# Altium PCB COIL-BOOST-10A.PcbDoc (part 1 of 5)
Units mm, origin at the board's own origin, x right, y up, seen from the top; angles counter-clockwise.
Board outline 80.1 x 100.1 mm, 4 copper layers (L1, L2, L3, L4), stack 1.512 mm thick; 282 components, 151 nets, 786 pads, 740 vias.
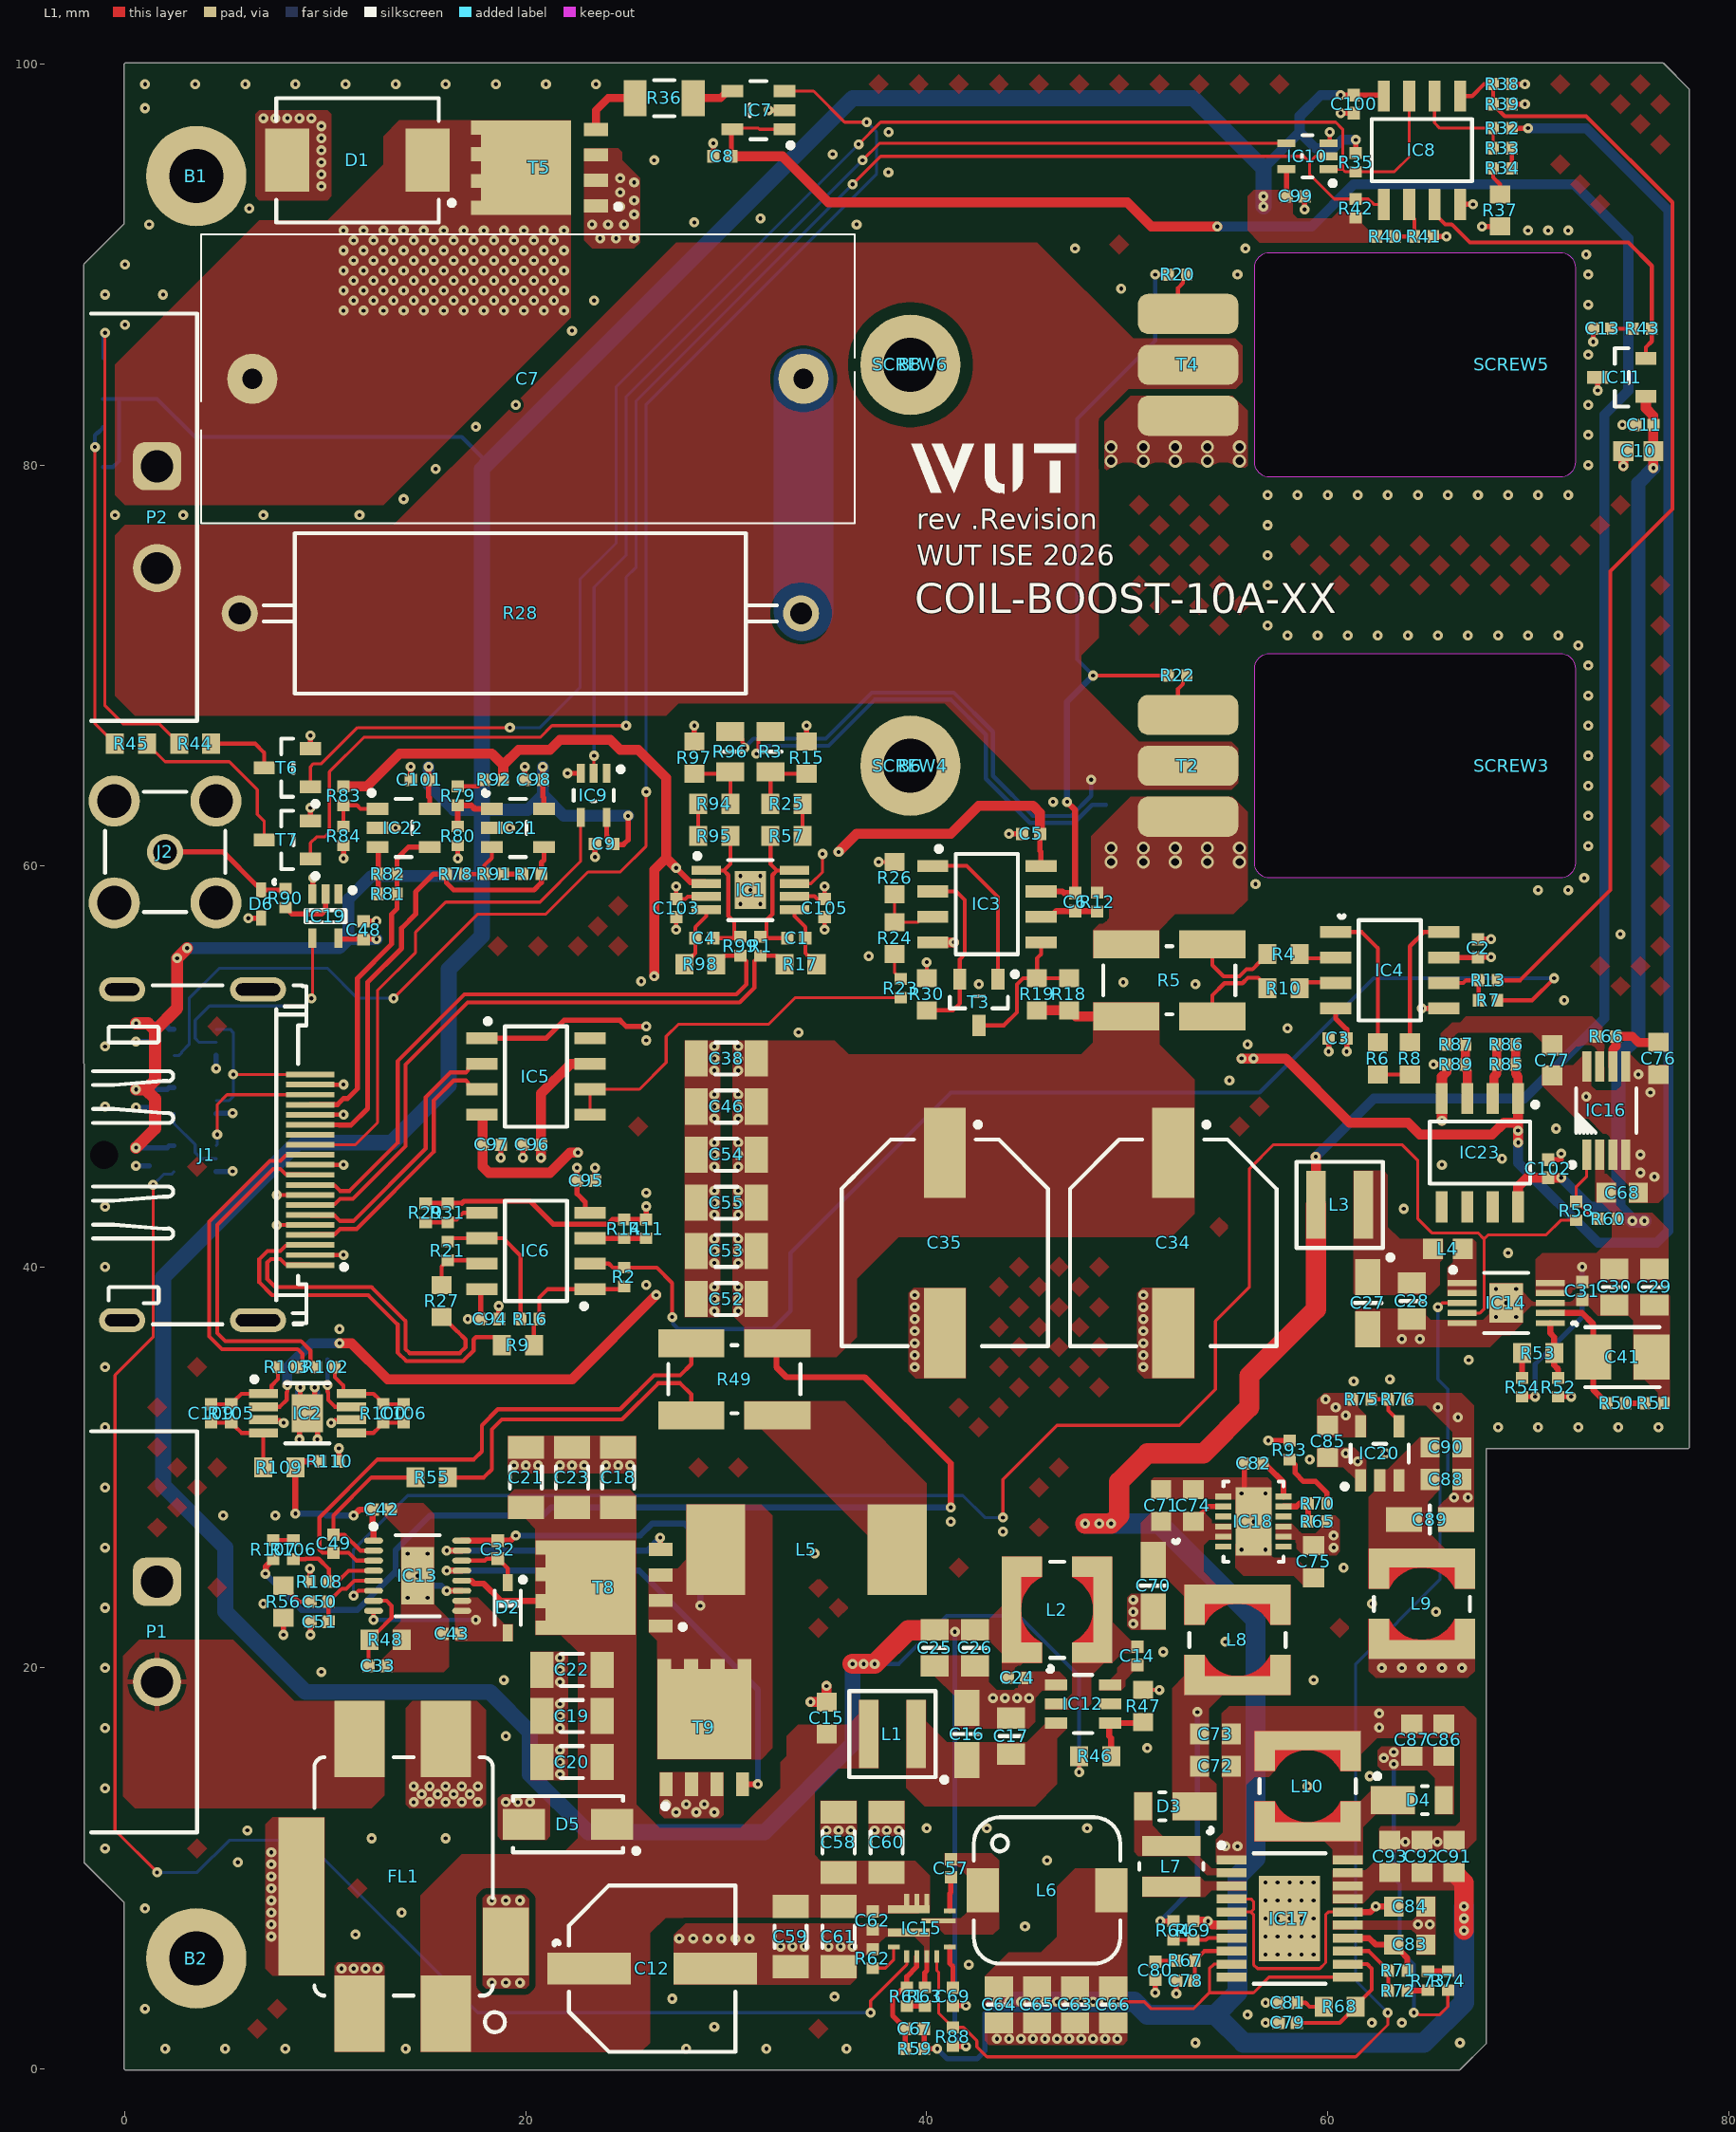
[diagram p0: L1 view]
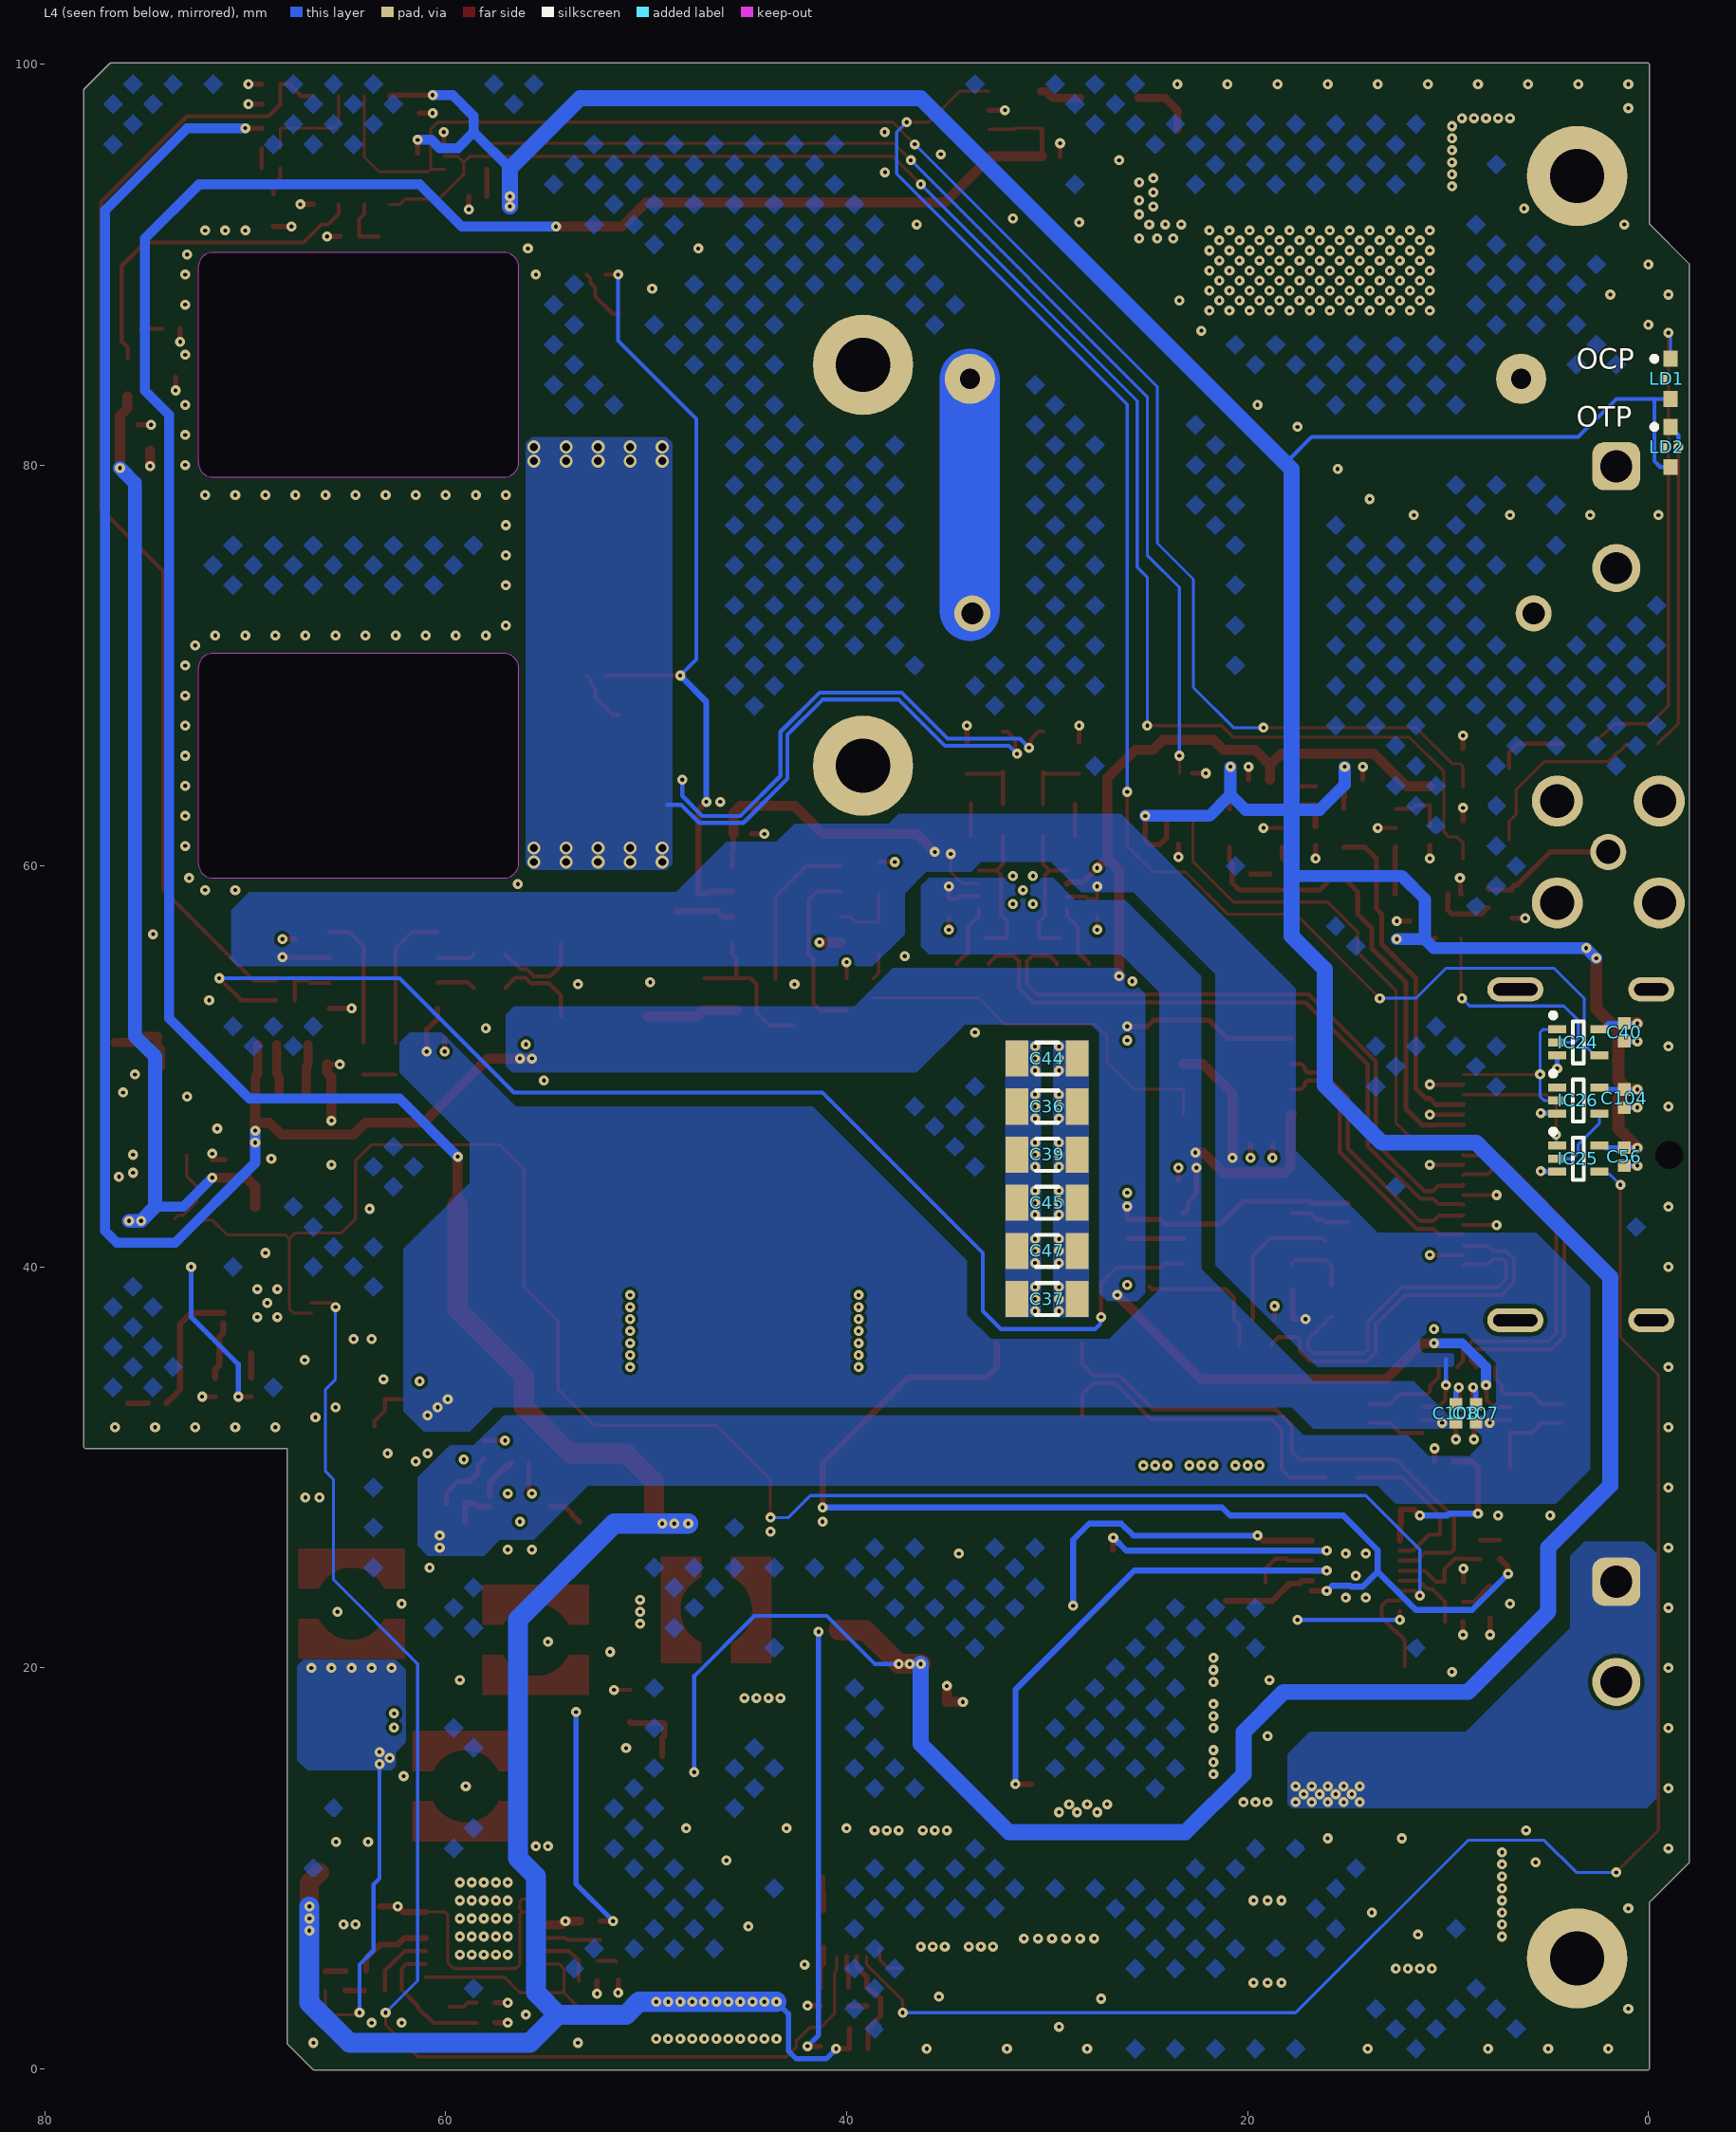
[diagram p1: L4 view, seen from below]
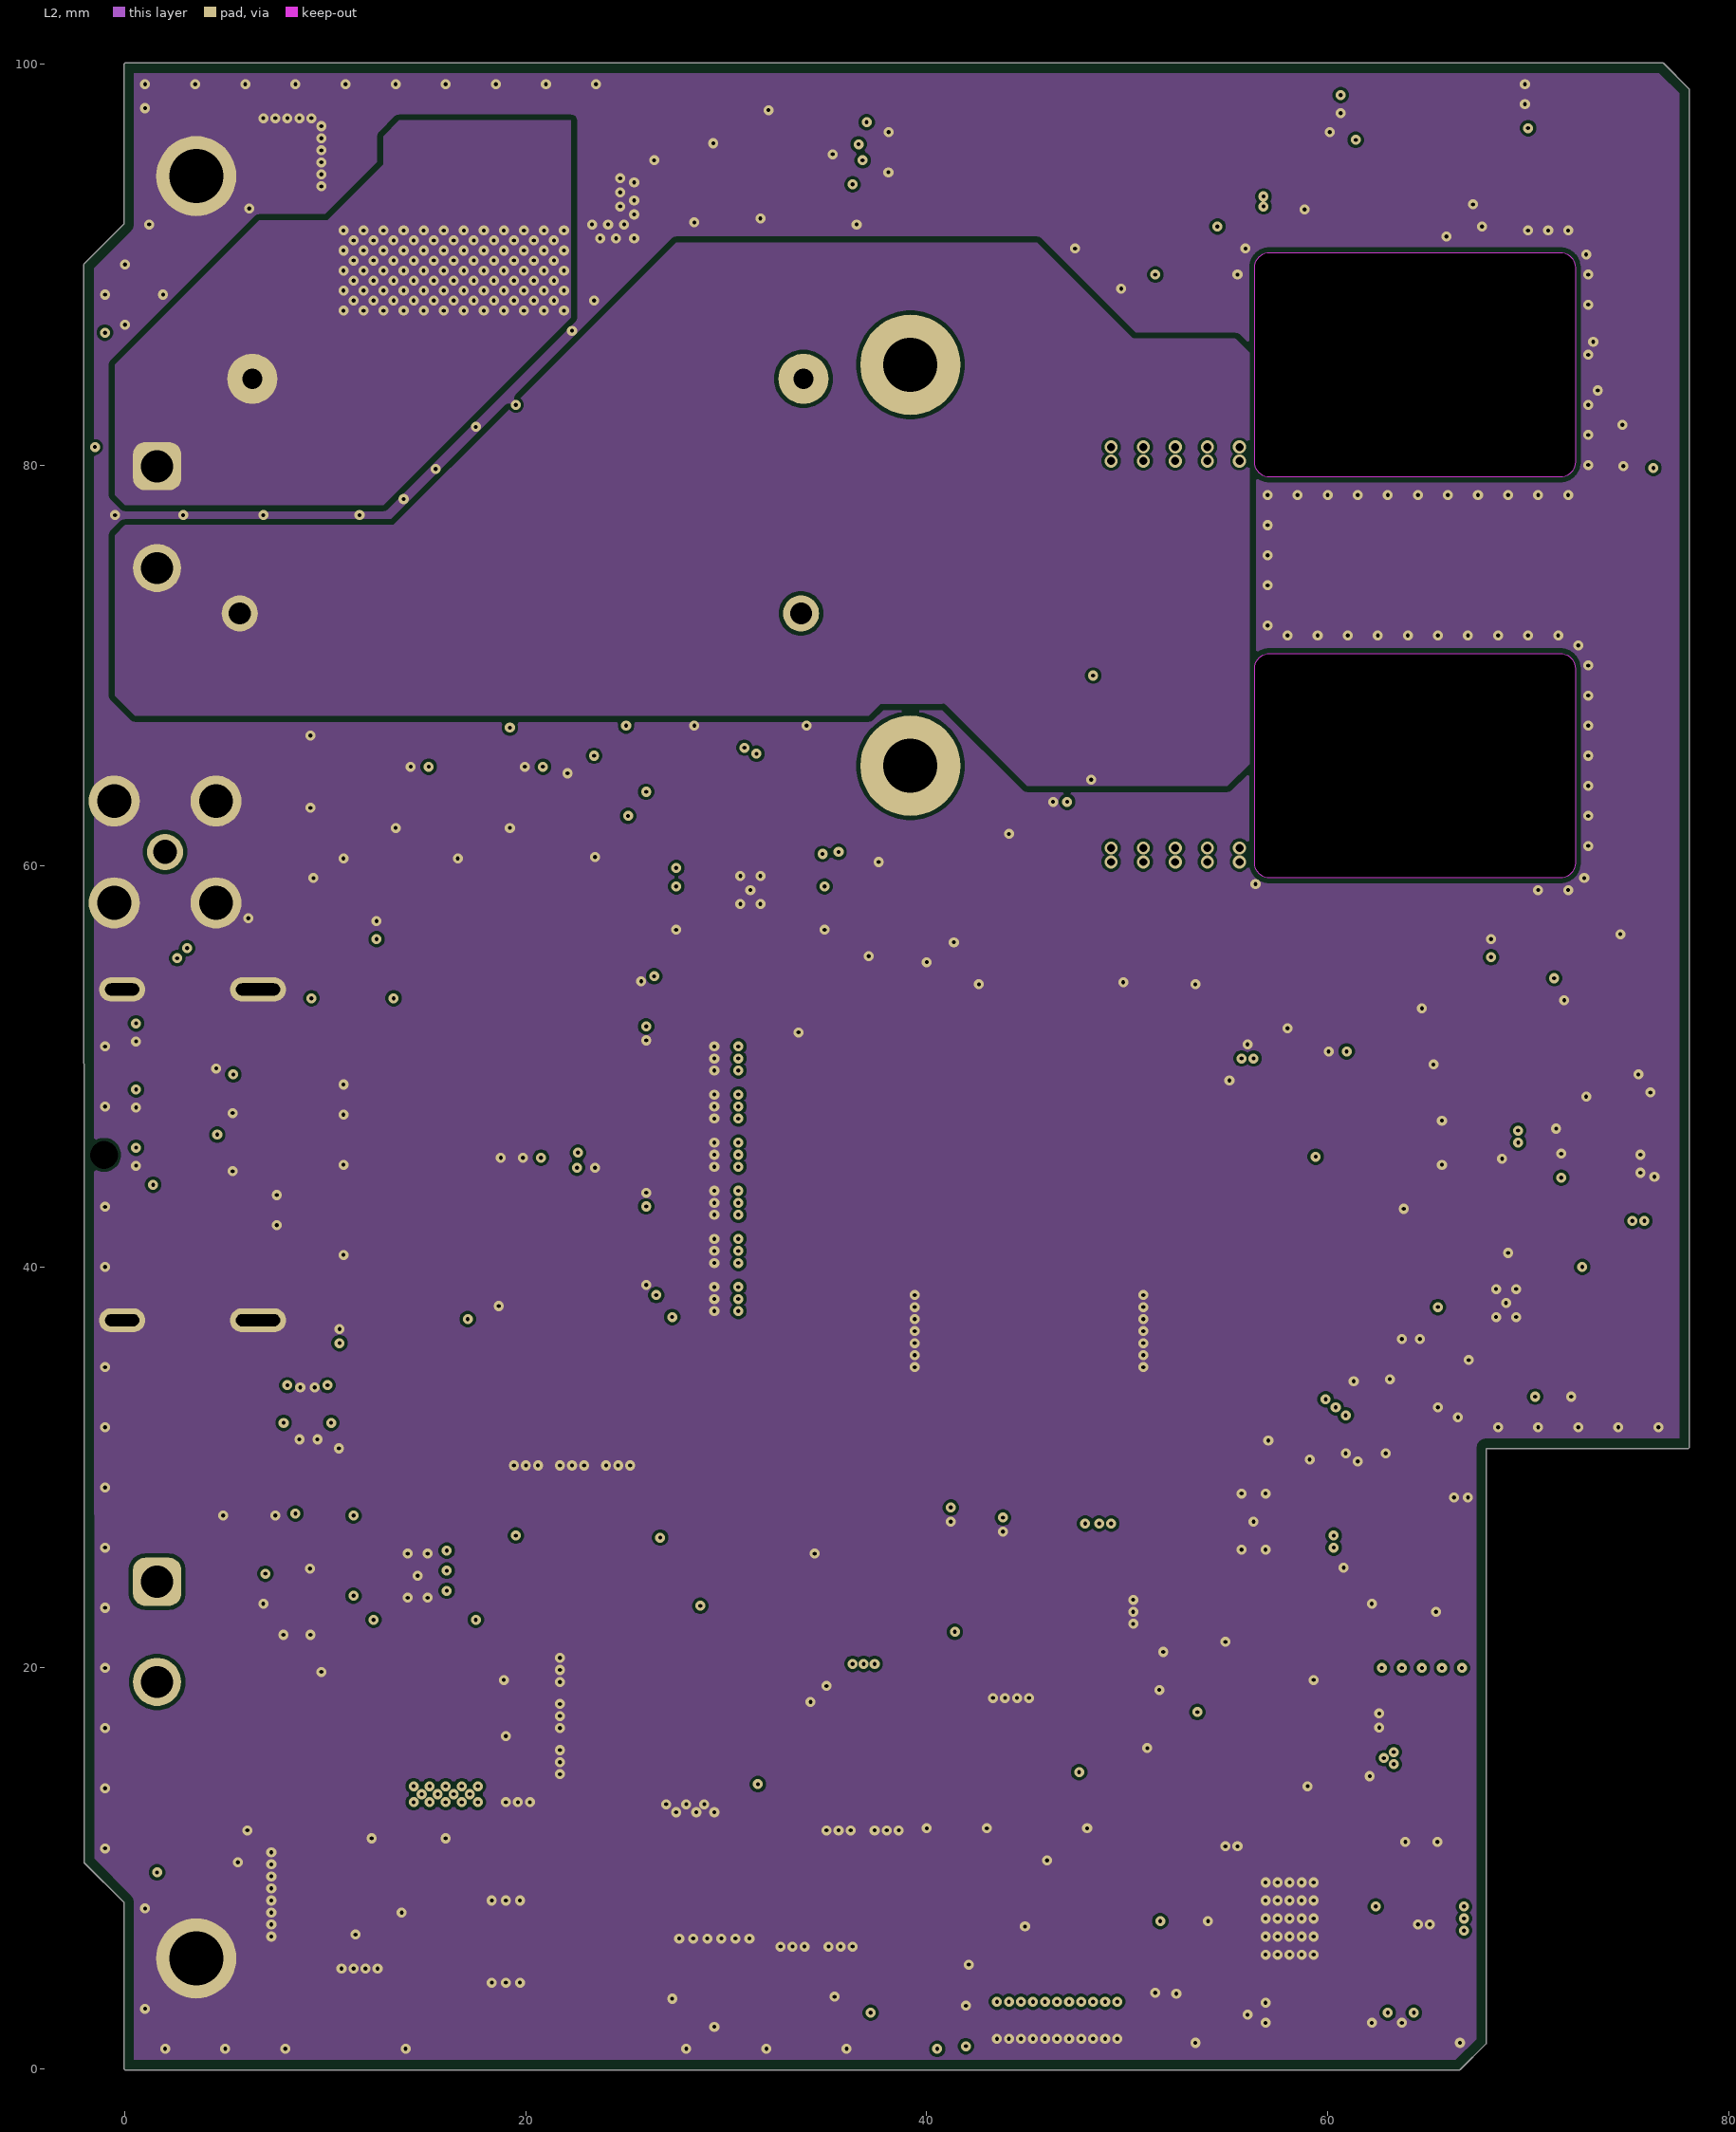
[diagram p2: L2]
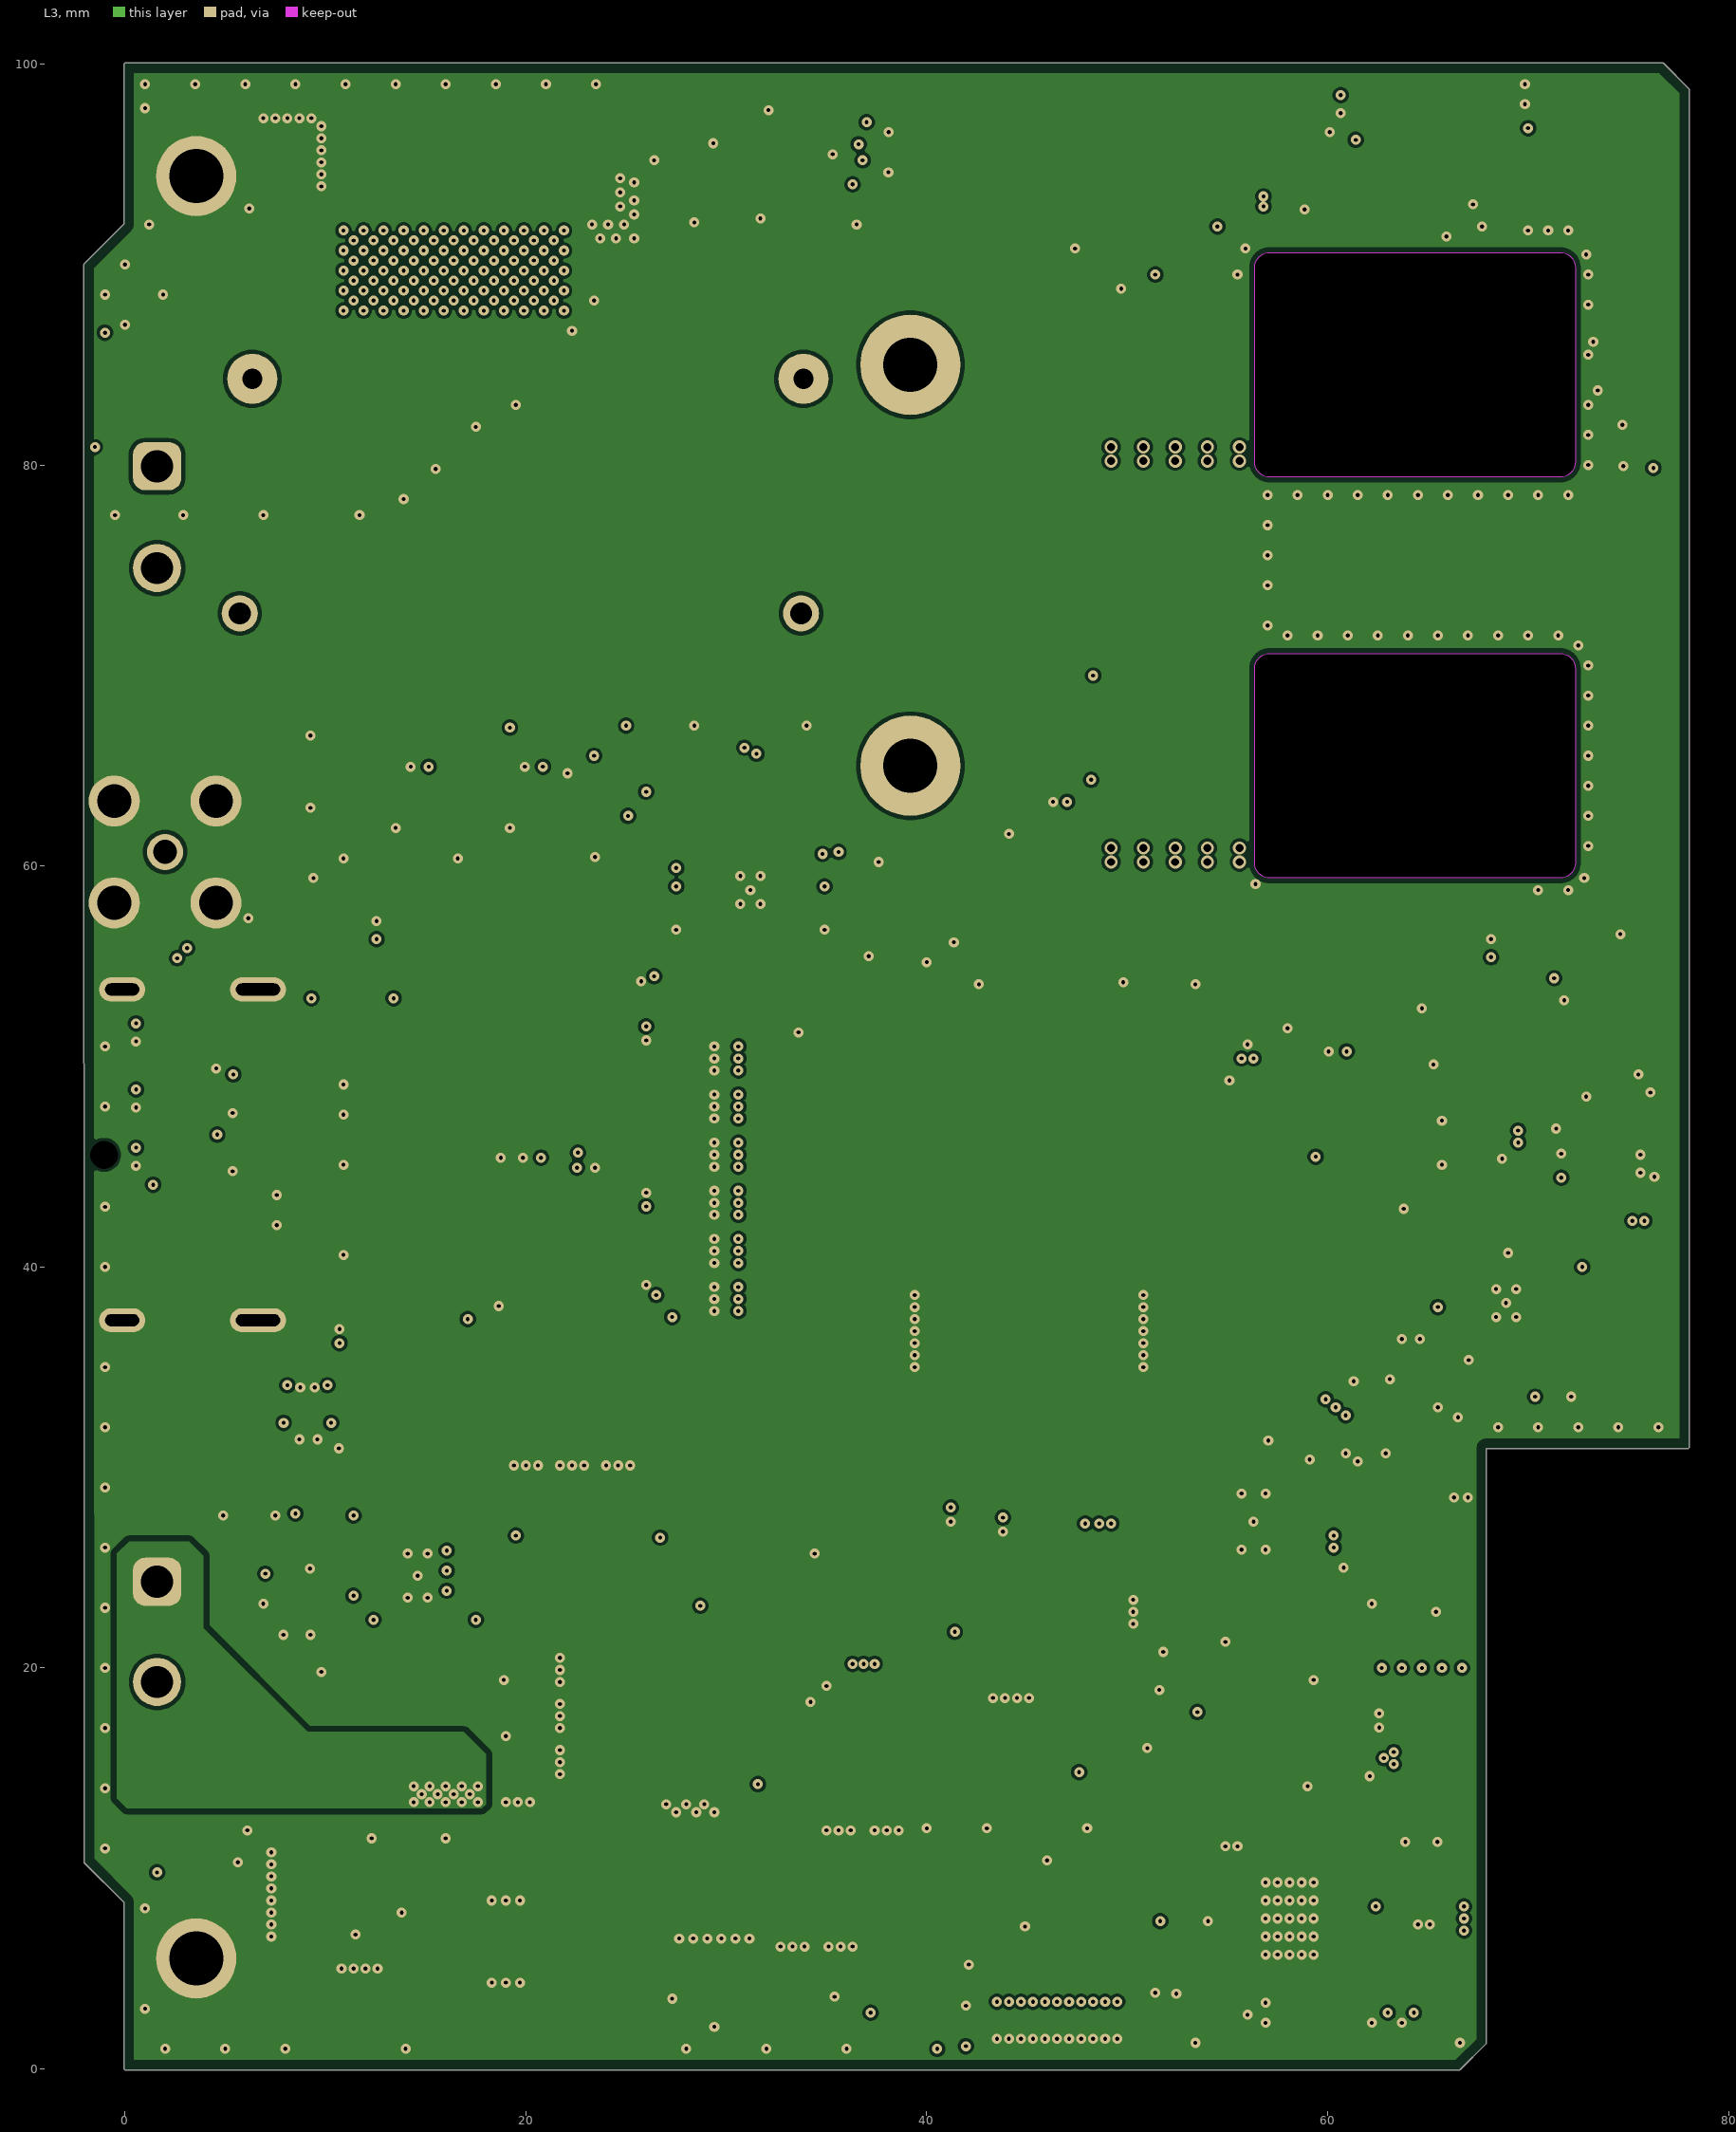
[diagram p3: L3]
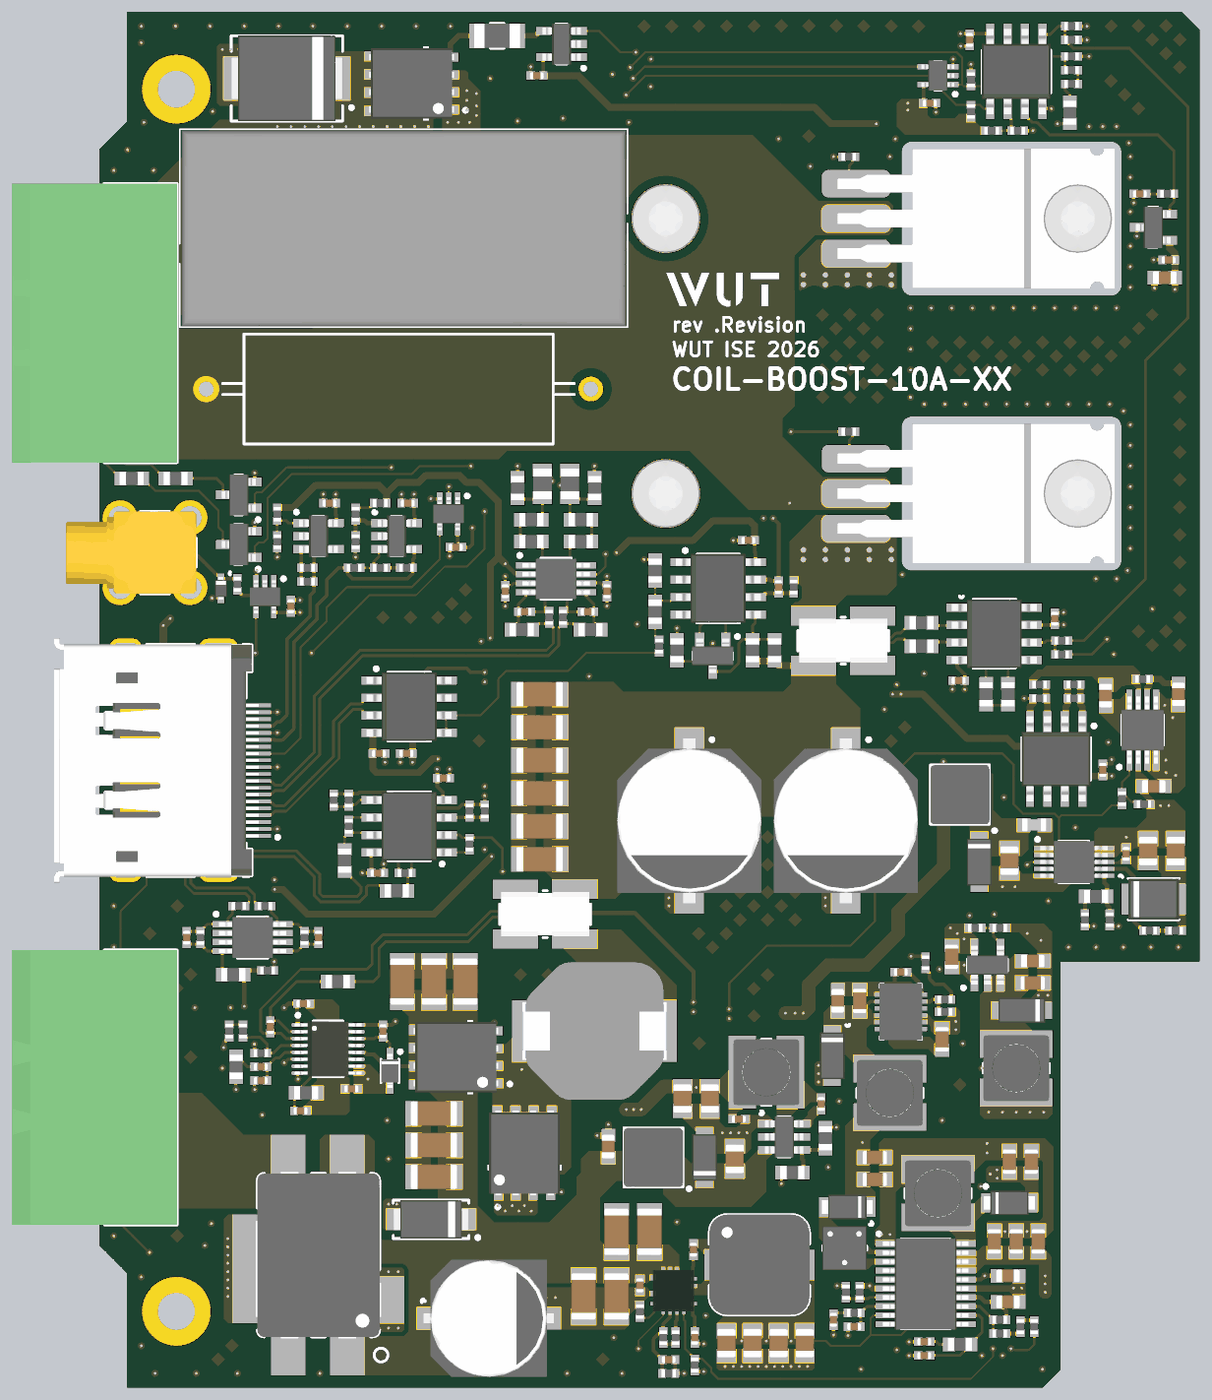
[diagram p6: 3D render of the assembled board from above, using the file's embedded part models]
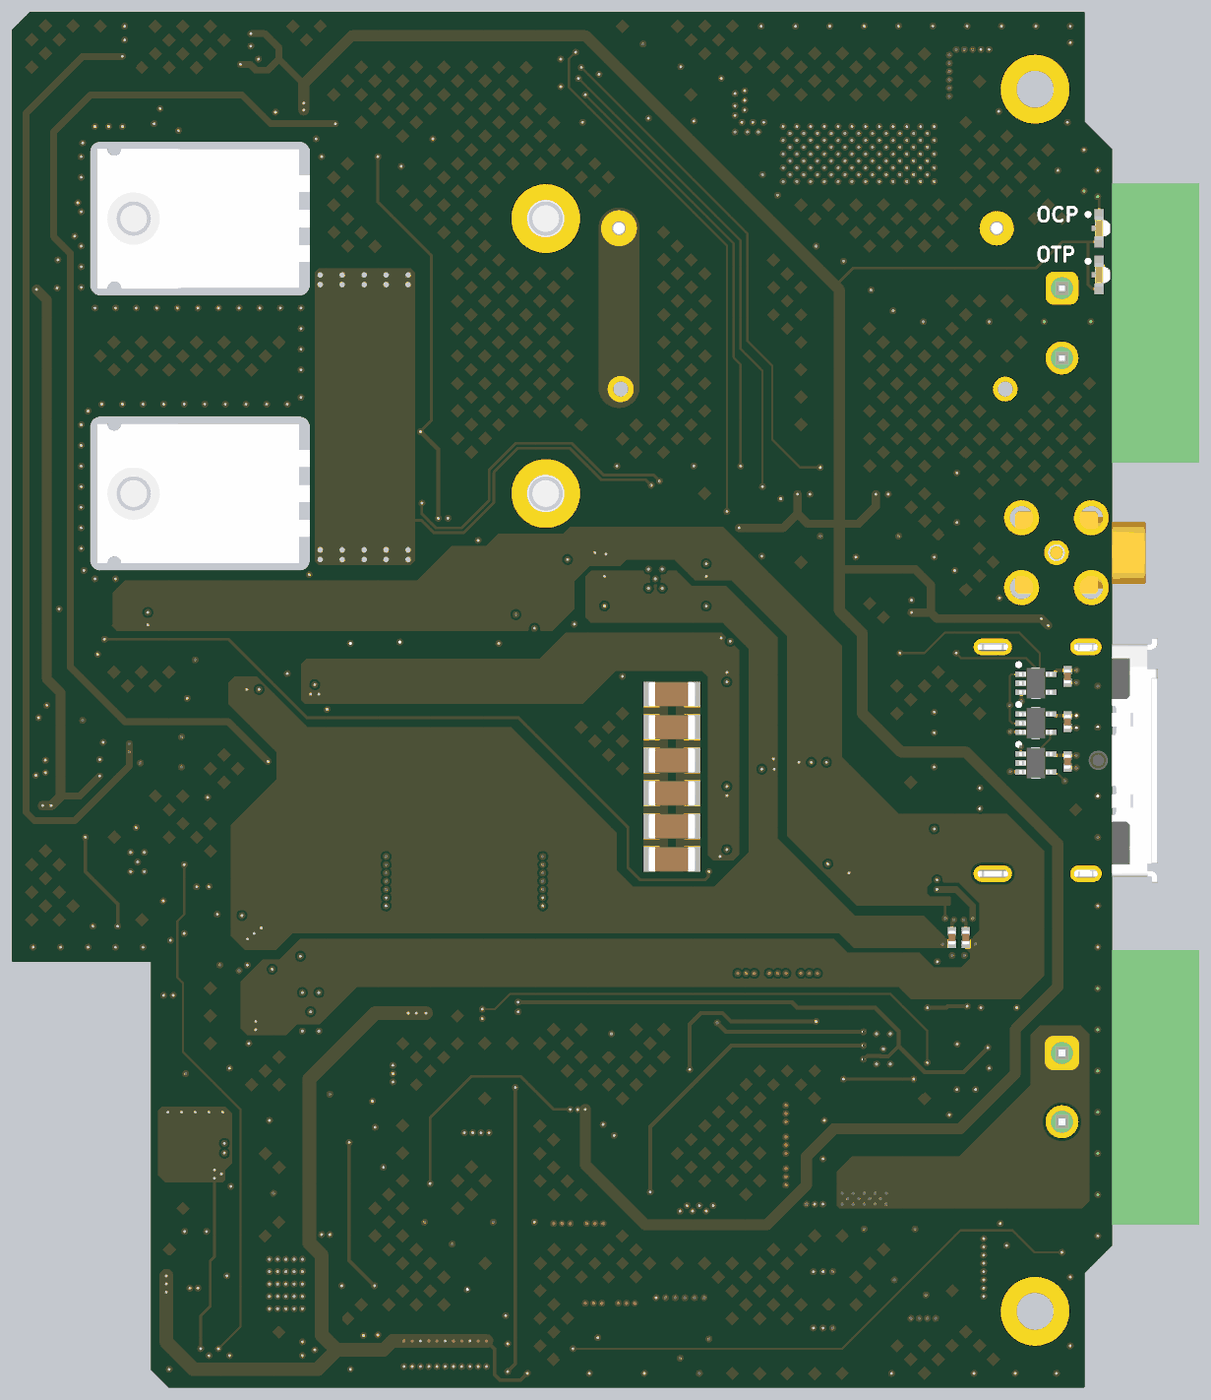
[diagram p7: 3D render of the assembled board from below, using the file's embedded part models]

## Layer stack, top to bottom
Top Solder: solder mask 0.025, Solder Resist, Dk 3.5
L1: signal copper 0.035
Dielectric 1: dielectric 0.138, FR-4, Dk 4.3
L2: signal copper 0.018
Dielectric 2: core 1.13, FR-4, Dk 4.6
L3: signal copper 0.018
Dielectric2: dielectric 0.138, FR-4, Dk 4.3
L4: signal copper 0.035
Bottom Solder: solder mask 0.025, Solder Resist, Dk 3.5

## Board outline
-2.036,10.284 -0.05,8.299 -0.05,0 0,-0.05 29.182,-0.05 66.577,-0.05 66.612,-0.036 67.906,1.258 67.92,1.293 67.92,30.95 78,30.95 78.05,31 78.05,98.724 78.036,98.76 76.76,100.035 76.725,100.05 29.182,100.05 0.001,100.05 -0.05,100 -0.05,92.021 -2.036,90.036 -2.05,90

## Design rules (kind name [scope] priority, off if disabled: settings)
BoardOutlineClearance [All] p1: gap=0.254 ignorepadtopadclearanceinfootprint=FALSE except(0: Arc-SplitContinuation Track-SplitContinuation SMDPad-SplitContinuation THPad-SplitContinuation Via-SplitContinuation Fill-SplitContinuation Poly-SplitContinuation Region-SplitContinuation Text-SplitContinuation; 0.2: THPad-OutlineEdge; 0.5: Poly-OutlineEdge)
Clearance Clearance_balance_to_keepout [InNamedPolygon('BALANCE') vs OnLayer('Keep-Out Layer')] p1: gap=0.3 ignorepadtopadclearanceinfootprint=TRUE
Clearance Clearance_balance_to_all [InNamedPolygon('BALANCE')] p2: gap=1 ignorepadtopadclearanceinfootprint=TRUE
Clearance [All] p3: gap=0.15 ignorepadtopadclearanceinfootprint=TRUE except(0.2: Track-Poly SMDPad-Poly THPad-Poly; 0.3: Poly-Poly)
ComponentClearance [All] p1: gap=0.15 collisioncheckmode=3 verticalgap=0.254 showdistances=FALSE
DiffPairsRouting DiffPairsRouting_D100 [InNetClass('D100')] p1: maxlimit=0.254 minlimit=0.15 mostfreqgap=0.254 toplayer_maxgap=0.15 toplayer_prefgap=0.15 toplayer_minwidth=0.13 toplayer_maxwidth=0.13 toplayer_prefwidth=0.13 bottomlayer_maxgap=0.15 bottomlayer_prefgap=0.15 bottomlayer_minwidth=0.13 bottomlayer_maxwidth=0.13 bottomlayer_prefwidth=0.13 impedanceprofiledriven=TRUE impedanceprofileid={F8CF765A-2A12-494A-A20F-71D870606033} impedanceprofilevalue=100.000000 maxuncoupledlength=12.7
DiffPairsRouting DiffPairsRouting_Analog [InNetClass('Analog')] p2: maxlimit=0.254 minlimit=0.2 mostfreqgap=0.254 toplayer_maxgap=0.2 toplayer_prefgap=0.2 toplayer_minwidth=0.2 toplayer_maxwidth=0.2 toplayer_prefwidth=0.2 midlayer1_mingap=0.254 midlayer1_minwidth=0.381 midlayer1_maxwidth=0.381 midlayer1_prefwidth=0.381 midlayer2_mingap=0.254 midlayer2_minwidth=0.381 midlayer2_maxwidth=0.381 midlayer2_prefwidth=0.381 bottomlayer_maxgap=0.2 bottomlayer_prefgap=0.2 bottomlayer_minwidth=0.2 bottomlayer_maxwidth=0.2 bottomlayer_prefwidth=0.2 maxuncoupledlength=12.7
Height [All] p1: minheight=0 maxheight=50 prefheight=12.7
HoleSize [All] p1: absolutevalues=TRUE maxlimit=5 minlimit=0.025 maxpercent=80.000 minpercent=20.000
MinimumSolderMaskSliver [All] p1: minsoldermaskwidth=0.1
PlaneConnect [All] p1: pad.planeconnectstyle=Relief pad.reliefexpansion=0.3 pad.reliefentries=4 pad.reliefconductorwidth=0.254 pad.reliefairgap=0.254 via.planeconnectstyle=Direct via.reliefexpansion=0.508 via.reliefentries=4 via.reliefconductorwidth=0.254 via.reliefairgap=0.254
PolygonConnect [All] p1: connectstyle=Direct reliefconductorwidth=0.254 reliefentries=4 polygonreliefangle="90 Angle" airgapwidth=0.254
RoutingVias [All] p1: holewidth=0.2 width=0.5 viastyle="Through Hole" minholewidth=0.2 minwidth=0.5 maxholewidth=0.5 maxwidth=1
SilkToSolderMaskClearance [IsPad] p1: minsilkscreentomaskgap=0.1 clearancetoexposedcopper=TRUE
SolderMaskExpansion [All] p1: expansion=0.05 istentingtop=FALSE
SupplyNets "Schematic Supply Nets_16" [InNet('P12V0')] p1: voltage=0.000
SupplyNets "Schematic Supply Nets_15" [InNet('N15V0')] p2: voltage=0.000
SupplyNets "Schematic Supply Nets_14" [InNet('VBUCK')] p3: voltage=0.000
SupplyNets "Schematic Supply Nets_13" [InNet('P5V0_REF')] p4: voltage=0.000
SupplyNets "Schematic Supply Nets_12" [InNet('P5V4A')] p5: voltage=0.000
SupplyNets "Schematic Supply Nets_11" [InNet('N16V0')] p6: voltage=0.000
SupplyNets "Schematic Supply Nets_10" [InNet('P16V0')] p7: voltage=0.000
SupplyNets "Schematic Supply Nets_9" [InNet('P2V5_REF')] p8: voltage=0.000
SupplyNets "Schematic Supply Nets_4" [InNet('GND')] p9: voltage=0.000
SupplyNets "Schematic Supply Nets_3" [InNet('P3V3')] p10: voltage=0.000
SupplyNets "Schematic Supply Nets_2" [InNet('P15V0')] p11: voltage=0.000
Width [All] p1: maxlimit=3 minlimit=0.13 preferedwidth=0.13
23 further rules are at their usual default settings.

## Classes and differential pairs
net class Analog: IMON_N IMON_P ISET_N ISET_P V_SENSE_N V_SENSE_P V_TRACK_N V_TRACK_P
component class U_Power_Supply: C14 C15 C16 C17 C18 C19 C20 C21 C22 C23 C24 C25 C26 C27 C28 C29 C30 C31 C32 C33 C34 C35 C36 C37 C38 C39 C41 C42 C43 C44 C45 C46 C47 C49 C50 C51 C52 C53 C54 C55 C57 C58 C59 C60 C61 C62 C63 C64 C65 C66 C67 C68 C69 C70 C71 C72 C73 C74 C75 C76 C77 C78 C79 C80 C81 C82 C83 C84 C85 C86 C87 C88 C89 C90 C91 C92 C93 C102 D2 D3 D4 IC12 IC13 IC14 IC15 IC16 IC17 IC18 IC20 IC23 L1 L2 L3 L4 L5 L6 L7 L8 L9 L10 R46 R47 R48 R49 R50 R51 R52 R53 R54 R55 R56 R58 R59 R60 R61 R62 R63 R64 R65 R66 R67 R68 R69 R70 R71 R72 R73 R74 R75 R76 R85 R86 R87 R88 R89 R93 R106 R107 R108 T8 T9
component class COIL-BOOST-10A: B1 B2 B6 B8 C1 C2 C3 C4 C5 C6 C7 C8 C9 C10 C11 C12 C13 C40 C48 C56 C94 C95 C96 C97 C98 C99 C100 C101 C103 C104 C105 C106 C107 C108 C109 D1 D5 D6 FL1 IC1 IC2 IC3 IC4 IC5 IC6 IC7 IC8 IC9 IC10 IC11 IC19 IC21 IC22 IC24 IC25 IC26 J1 J2 LD1 LD2 P1 P2 R1 R2 R3 R4 R5 R6 R7 R8 R9 R10 R11 R12 R13 R14 R15 R16 R17 R18 R19 R20 R21 R22 R23 R24 R25 R26 R27 R28 R29 R30 R31 R32 R33 R34 R35 R36 R37 R38 R39 R40 R41 R42 R43 R44 R45 R57 R77 R78 R79 R80 R81 R82 R83 R84 R90 R91 R92 R94 R95 R96 R97 R98 R99 R100 R102 R103 R105 R109 R110 SCREW3 SCREW4 SCREW5 SCREW6 T2 T3 T4 T5 T6 T7
differential pair V_TRACK: +V_TRACK_P -V_TRACK_N
differential pair V_SENSE: +V_SENSE_P -V_SENSE_N
differential pair ISET: +ISET_P -ISET_N
differential pair IMON: +IMON_P -IMON_N

## Components (designator, comment, footprint, x,y, rotation, side; value= is the part's Value field where it differs from the comment)
B1 "Plated Hole" MTG270_500#1 3.556,94.412 r90 top
B2 "Plated Hole" MTG270_500#1 3.556,5.512 r90 top
B6 "Plated Hole" MTG270_500#2 39.182,65 r0 top locked
B8 "Plated Hole" MTG270_500#2 39.182,85 r0 top locked
C1 "1nF" CAPC1005X55N 33.5,56.4 r0 top
C2 "100nF" CAPC1005X55N 67.5,55.9 r270 top
C3 "100nF" CAPC1005X55N 60.5,51.4 r0 top
C4 "1nF" CAPC1005X55N 28.9,56.4 r180 top
C5 "100nF" CAPC1005X55N 45.2,61.6 r0 top
C6 "100nF" CAPC1005X55N 47.4,58.2 r270 top
C7 "10µF" "Kemet R71 32x28x14" 20.1,84.3 r0 top
C8 "100nF" CAPC1005X55N 29.8,95.4 r0 top
C9 "100nF" CAPC1005X55N 23.9,61.1 r0 top
C10 "10uF" CAPC1608X80N 75.5,80.7 r0 top
C11 "100nF" CAPC1005X55N 75.8,82 r0 top
C12 "220uF" CAPAE830X620N 26.3,5 r0 top
C13 "1uF" CAPC1005X55N 73.7,86.8 r0 top
C14 "100nF" CAPC1005X55N 50.5,20.6 r90 top
C15 "1uF" CAPC1608X87N 35,17.5 r270 top
C16 "10uF" CAPMP3216X180N 42,16.7 r90 top
C17 "22uF" CAPC2012X135N 44.2,16.6 r270 top
C18 "22uF" CAPC3216X180N 24.6,29.5 r270 top
C19 "22uF" CAPC3216X180N 22.3,17.6 r0 top
C20 "22uF" CAPC3216X180N 22.3,15.3 r0 top
C21 "22uF" CAPC3216X180N 20,29.5 r270 top
C22 "22uF" CAPC3216X180N 22.3,19.9 r0 top
C23 "22uF" CAPC3216X180N 22.3,29.5 r270 top
C24 "100nF" CAPC1005X55N 44.5,19.5 r180 top
C25 "22uF" CAPC2012X135N 40.4,21 r90 top
C26 "22uF" CAPC2012X135N 42.4,21 r90 top
C27 "10uF" CAPMP3216X180N 62,38.2 r270 top
C28 "22uF" CAPC2012X135N 64.2,38.3 r90 top
C29 "22uF" CAPC2012X135N 76.3,39 r90 top
C30 "22uF" CAPC2012X135N 74.3,39 r90 top
C31 "100nF" CAPC1005X55N 72.7,38.8 r90 top
C32 "100nF" CAPC1005X55N 18.6,25.9 r270 top
C33 "1nF" CAPC1005X55N 12.6,20.1 r180 top
C34 "470uF" CAPAE1030X1020N 52.3,41.2 r270 top
C35 "470uF" CAPAE1030X1020N 40.9,41.2 r270 top
C36 "22uF" CAPC3216X180N 30,48 r0 bottom
C37 "22uF" CAPC3216X180N 30,38.4 r0 bottom
C38 "22uF" CAPC3216X180N 30,50.4 r0 top
C39 "22uF" CAPC3216X180N 30,45.6 r0 bottom
C40 "100nF" CAPC1005X55N 1.2,51.7 r90 bottom
C41 "22uF" CAPMP3528X210N 74.7,35.5 r0 top
C42 "100nF" CAPC1005X55N 12.8,27.9 r180 top
C43 "4.7uF" CAPC1005X55N 16.3,21.7 r180 top
C44 "22uF" CAPC3216X180N 30,50.4 r0 bottom
C45 "22uF" CAPC3216X180N 30,43.2 r0 bottom
C46 "22uF" CAPC3216X180N 30,48 r0 top
C47 "22uF" CAPC3216X180N 30,40.8 r0 bottom
C48 "100nF" CAPC1005X55N 11.9,56.8 r270 top
C49 "1nF" CAPC1005X55N 10.4,26.2 r90 top
C50 "4.7nF" CAPC1005X55N 9.7,23.3 r0 top
C51 "39pF" CAPC1005X55N 9.7,22.3 r0 top
C52 "22uF" CAPC3216X180N 30,38.4 r0 top
C53 "22uF" CAPC3216X180N 30,40.8 r0 top
C54 "22uF" CAPC3216X180N 30,45.6 r0 top
C55 "22uF" CAPC3216X180N 30,43.2 r0 top
C56 "100nF" CAPC1005X55N 1.2,45.5 r90 bottom
C57 "100nF" CAPC1005X55N 41.2,10 r270 top
C58 "22uF" CAPC3216X180N 35.6,11.3 r270 top
C59 "22uF" CAPC3216X180N 33.2,6.6 r90 top
C60 "22uF" CAPC3216X180N 38,11.3 r270 top
C61 "22uF" CAPC3216X180N 35.6,6.6 r90 top
C62 "100nF" CAPC1005X55N 37.3,7.4 r270 top
C63 "22uF" CAPC2012X135N 47.4,3.2 r90 top
C64 "22uF" CAPC2012X135N 43.6,3.2 r90 top
C65 "22uF" CAPC2012X135N 45.5,3.2 r90 top
C66 "22uF" CAPC2012X135N 49.3,3.2 r90 top
C67 "100pF" CAPC1005X55N 39.4,2 r0 top
C68 "1uF" CAPC1608X87N 74.7,43.7 r180 top
C69 "100nF" CAPC1005X55N 41.3,3.6 r270 top
C70 "10uF" CAPMP3216X180N 51.3,24.1 r270 top
C71 "1uF" CAPC1608X87N 51.7,28.1 r270 top
C72 "10uF" CAPC1709X100N 54.4,15.1 r180 top
C73 "10uF" CAPC1709X100N 54.4,16.7 r180 top
C74 "10uF" CAPC1709X100N 53.3,28.1 r270 top
C75 "10uF" CAPC1709X100N 59.3,25.3 r90 top
C76 "1uF" CAPC1608X87N 76.5,50.4 r90 top
C77 "10uF" CAPC1608X80N 71.2,50.3 r90 top
C78 "27pF" CAPC1005X55N 52.9,4.4 r0 top
C79 "47pF" CAPC1005X55N 58,2.3 r0 top
C80 "470pF" CAPC1005X55N 51.4,4.9 r90 top
C81 "15nF" CAPC1005X55N 58,3.3 r0 top
C82 "10nF" CAPC1005X55N 56.3,30.2 r0 top
C83 "1uF" CAPC1608X87N 64.1,6.2 r180 top
C84 "1uF" CAPC1608X87N 64.1,8.1 r180 top
C85 "10uF" CAPC1709X100N 60,31.3 r90 top
C86 "10uF" CAPC1709X100N 65.8,16.4 r270 top
C87 "10uF" CAPC1709X100N 64.2,16.4 r270 top
C88 "10uF" CAPC1709X100N 65.9,29.4 r180 top
C89 "10uF" CAPMP3216X180N 65.1,27.4 r180 top
C90 "1uF" CAPC1608X87N 65.9,31 r180 top
C91 "10uF" CAPC1709X100N 66.3,10.6 r270 top
C92 "10uF" CAPC1709X100N 64.7,10.6 r270 top
C93 "10uF" CAPC1709X100N 63.1,10.6 r270 top
C94 "100nF" CAPC1005X55N 18.2,37.4 r180 top
C95 "100nF" CAPC1005X55N 23,44.3 r180 top
C96 "100nF" CAPC1005X55N 20.3,46.1 r0 top
C97 "100nF" CAPC1005X55N 18.3,46.1 r180 top
C98 "100nF" CAPC1005X55N 20.4,64.3 r0 top
C99 "100nF" CAPC1005X55N 58.4,93.4 r180 top
C100 "100nF" CAPC1005X55N 61.3,98 r90 top
C101 "100nF" CAPC1005X55N 14.7,64.3 r0 top
C102 "100nF" CAPC1005X55N 71,44.9 r270 top
C103 "100nF" CAPC1005X55N 27.5,57.9 r90 top
C104 "100nF" CAPC1005X55N 1.2,48.4 r90 bottom
C105 "100nF" CAPC1005X55N 34.9,57.9 r90 top
C106 "1nF" CAPC1005X55N 13.9,32.7 r270 top
C107 "100nF" CAPC1005X55N 8.6,32.7 r270 bottom
C108 "100nF" CAPC1005X55N 9.6,32.7 r270 bottom
C109 "1nF" CAPC1005X55N 4.3,32.7 r270 top
D1 "SMCJ150A" DIOM7959X262N 11.6,95.2 r180 top
D2 "BAT54HT1G" SOD2513X100N 19.1,23 r270 top
D3 "DFLS1100-7" DIODES-INC_POWERDI123 52.4,13.1 r180 top
D4 "DFLS1100-7" DIODES-INC_POWERDI123 64.2,13.4 r0 top
D5 "BZG03C27" DIOM5326X230N 22.1,12.2 r180 top
D6 "PESD3V3S1UB" SODFL1608X65N 6.8,58.1 r270 top
FL1 "10A/50VDC" FIL_MURATA_BNX02 13.9,9.6 r270 top
IC1 "OPA1632DGN" SOP65P490X110-9N-R157X189 31.2,58.8 r0 top
IC2 "OPA1632DGN" SOP65P490X110-9N-R157X189 9.1,32.7 r0 top
IC3 "OPA2197ID" SOIC127P600X175-8N 43,58.1 r0 top
IC4 "AD620ARZ" SOIC127P600X175-8N 63.1,54.8 r0 top
IC5 "INA157UA" SOIC127P600X175-8N 20.5,49.5 r0 top value=24kΩ
IC6 "OPA2197ID" SOIC127P600X175-8N 20.5,40.8 r180 top
IC7 "UCC27519AQDBVRQ1" SOT95P280X145-5N 31.6,97.7 r180 top
IC8 "LM393M/NOPB" SOIC127P600X175-8N 64.7,95.7 r90 top
IC9 "SN74LVC1G17DCK" SOT65P210X110-5N 23.379,63.525 r270 top
IC10 "74LVC1G32GW" SOT65P212X110-5N 59,95.4 r180 top
IC11 "LM45CIM3/NOPB" SOT95P251X112-3N 74.675,84.371 r180 top
IC12 "AP62201WU-7" SOT95P280X100-6N 47.8,18.2 r0 top
IC13 "LTC7803JMSE#PBF" TSSOP50P490X86_HS-17N 14.6,24.6 r0 top
IC14 "LT3042EMSE#PBF" SOP50P490X110-11N-R168X198 68.9,38.2 r0 top
IC15 "TPS56838RPAR" RPA0010A 39.75,7.01 r90 top
IC16 "LTC6655BHMS8-5#PBF" SOP65P490X110-8N 73.9,47.8 r90 top
IC17 "ADP5070AREZ" SOP65P640X120-21N-R305X425 58.1,7.5 r0 top
IC18 "LT1763CDE" SON50P300X400X80-13N-R180X340 56.3,27.3 r180 top
IC19 "SN74LVC1G17DCK" SOT65P210X110-5N 10,57.5 r270 top
IC20 "LT1964ES5-SD#TRMPBF" SOT95P280X100-5N 62.6,30.7 r90 top
IC21 "LM321MF" SOT95P280X145-5N 19.6,61.9 r0 top
IC22 "LM321MF" SOT95P280X145-5N 13.9,61.9 r0 top
IC23 "OPA2197ID" SOIC127P600X175-8N 67.6,45.7 r270 top
IC24 "74LVC1G32GW" SOT65P212X110-5N 3.5,51.2 r180 bottom
IC25 "74AHC1G08GW" SOT65P212X110-5N 3.5,45.4 r180 bottom
IC26 "74AHC1G14GW" SOT65P212X110-5N 3.5,48.3 r180 bottom
J1 "Display Port" MOLEX_47272-0001 9.237,44.843 r270 top
J2 "60611002111502" 60611002111502 2,60.7 r270 top
L1 "6.8uH" IND_COILCRAFT_XAL4030 38.285,16.7 r0 top
L2 "3.3uH" IND_WURTH_WE-TPC_4828 46.5,22.9 r180 top
L3 "6.8uH" IND_COILCRAFT_XAL4030 60.6,43.1 r0 top
L4 "120R@100MHz" INDC1608X65N 66,40.9 r0 top
L5 "1.5µH" SPM10065VT-1R5M-D 34,25.9 r0 top
L6 "3.3uH" IND_WURTH_WE-PD_7332(METAL) 46,8.9 r0 top
L7 "4.7uH" IND_COILCRAFT_EPL3015 52.2,10.1 r90 top
L8 "33uH" IND_WURTH_WE-TPC_4828 55.5,21.4 r90 top
L9 "33uH" IND_WURTH_WE-TPC_4828 64.7,23.2 r90 top
L10 "33uH" IND_WURTH_WE-TPC_4828 59,14.1 r90 top
LD1 "Red" LED_AVAGO_HSMC-C120 -1.1,84.3 r270 bottom
LD2 "Red" LED_AVAGO_HSMC-C120 -1.1,80.9 r270 bottom
P1 "691317710002" 691317710002 -2.4,21.8 r270 top
P2 "691317510002" 691317510002 -2.4,77.4 r270 top
R1 "10k" RESC1005X35N 31.7,56 r270 top
R2 "10k" RESC1005X35N 24.9,39.5 r90 top
R3 "12k" RESC2012X60N 32.2,65.7 r270 top
R4 "200" RESC1608X55N 57.8,55.6 r0 top
R5 "0R01" RES_OHMITE_LVK25 52.1,54.3 r180 top
R6 "1k" RESC1608X55N 62.5,50.4 r90 top
R7 "10k" RESC1005X35N 68,53.3 r0 top
R8 "8R2" RESC1608X55N 64.1,50.4 r90 top
R9 "51" RESC1608X55N 19.6,36.1 r180 top
R10 "200" RESC1608X55N 57.8,53.9 r0 top
R11 "10k" RESC1005X35N 26,41.9 r270 top
R12 "1k" RESC1005X40N 48.5,58.2 r90 top
R13 "10k" RESC1005X35N 68,54.3 r180 top
R14 "10k" RESC1005X35N 24.9,41.9 r270 top
R15 "4k02" RESC1608X55N 34,65.4 r270 top
R16 "10k" RESC1005X35N 20.2,37.4 r0 top
R17 "51" RESC1608X55N 33.7,55.1 r180 top
R18 "200" RESC1608X55N 47.1,53.6 r270 top
R19 "200" RESC1608X55N 45.5,53.6 r270 top
R20 "100" RESC1005X40N 52.5,89.5 r0 top
R21 "10k" RESC1005X35N 16.1,40.8 r90 top
R22 "100" RESC1005X40N 52.5,69.5 r0 top
R23 "10k" RESC1005X35N 38.7,53.9 r90 top
R24 "200" RESC1608X55N 38.4,56.4 r90 top
R25 "1k" RESC1608X55N 33,63.1 r0 top
R26 "2k55" RESC1608X55N 38.4,59.4 r270 top
R27 "51" RESC1608X55N 15.8,38.3 r270 top
R28 "10" RES_OHMITE_OY_mb 19.725,72.6 r180 top
R29 "10k" RESC1005X35N 15,42.7 r270 top
R30 "1k" RESC1608X55N 40,53.6 r270 top
R31 "10k" RESC1005X35N 16.1,42.7 r270 top
R32 "10k" RESC1005X35N 68.72,96.8 r0 top
R33 "10k" RESC1005X35N 68.72,95.8 r180 top
R34 "10k" RESC1005X35N 68.72,94.8 r0 top
R35 "10k" RESC1005X35N 61.4,95.1 r90 top
R36 "15" RESC3216X65N 26.9,98.3 r180 top
R37 "200" RESC1608X55N 68.6,92.7 r90 top
R38 "10k" RESC1005X35N 68.72,99 r180 top
R39 "10k" RESC1005X35N 68.72,98 r180 top
R40 "10k" RESC1005X35N 62.9,91.4 r180 top
R41 "10k" RESC1005X35N 64.8,91.4 r180 top
R42 "10k" RESC1005X35N 61.4,92.8 r270 top
R43 "75" RESC1005X40N 75.7,86.8 r0 top
R44 "200" RESC1608X55N 3.5,66.1 r180 top
R45 "200" RESC1608X55N 0.3,66.1 r180 top
R46 "75k" RESC1608X55N 48.4,15.6 r180 top
R47 "24k" RESC1608X55N 50.8,18.1 r270 top
R48 "71k5" RESC1608X55N 13,21.4 r180 top
R49 "0R003" RES_OHMITE_LVK25 30.4,34.4 r0 top
R50 "27k" RESC1005X40N 74.4,33.2 r0 top
R51 "27k" RESC1005X40N 76.3,33.2 r0 top
R52 "3k" RESC1005X40N 71.5,34 r90 top
R53 "33k" RESC1608X55N 70.5,35.7 r180 top
R54 "10k" RESC1005X40N 69.7,34 r270 top
R55 "44R2" RESC1608X55N 15.3,29.5 r0 top
R56 "6k19" RESC1608X55N 7.9,23.3 r90 top
R57 "1k" RESC1608X55N 33,61.5 r180 top
R58 "100" RESC1005X40N 72.4,42.8 r270 top
R59 "383k" RESC1005X40N 39.4,1 r0 top
R60 "10k" RESC1005X40N 74,42.4 r180 top
R61 "10k" RESC1005X40N 39,3.6 r90 top
R62 "374k" RESC1005X40N 37.3,5.5 r270 top
R63 "10k" RESC1005X40N 39.9,3.6 r270 top
R64 "1M91" RESC1005X40N 52.3,6.9 r90 top
R65 "12k" RESC1005X40N 59.5,27.3 r0 top
R66 "0" RESC1005X40N 73.9,51.5 r180 top
R67 "12k" RESC1005X40N 52.9,5.4 r0 top
R68 "7k32" RESC1608X55N 60.6,3.1 r0 top
R69 "100k" RESC1005X40N 53.3,6.9 r270 top
R70 "1k" RESC1005X40N 59.5,28.2 r180 top
R71 "100k" RESC1005X40N 63.5,4.9 r0 top
R72 "1M91" RESC1005X40N 63.5,3.9 r0 top
R73 "100k" RESC1005X40N 65,4.4 r270 top
R74 "100k" RESC1005X40N 66,4.4 r90 top
R75 "12k" RESC1005X40N 61.7,33.4 r180 top
R76 "1k" RESC1005X40N 63.5,33.4 r180 top
R77 "10k" RESC1005X35N 20.3,59.6 r180 top
R78 "10k" RESC1005X35N 16.5,59.6 r180 top
R79 "10k" RESC1005X35N 16.6,63.5 r90 top
R80 "10k" RESC1005X35N 16.6,61.5 r90 top
R81 "10k" RESC1005X35N 13.1,58.6 r180 top
R82 "10k" RESC1005X35N 13.1,59.6 r0 top
R83 "10k" RESC1005X35N 10.9,63.5 r90 top
R84 "10k" RESC1005X35N 10.9,61.5 r90 top
R85 "10k" RESC1005X35N 68.9,50.1 r180 top
R86 "10k" RESC1005X35N 68.9,51.1 r180 top
R87 "10k" RESC1005X35N 66.4,51.1 r180 top
R88 "10k" RESC1005X40N 41.3,1.6 r270 top
R89 "10k" RESC1005X35N 66.4,50.1 r0 top
R90 "220" RESC1005X40N 8,58.4 r90 top
R91 "10k" RESC1005X35N 18.4,59.6 r180 top
R92 "10k" RESC1005X35N 18.4,64.3 r0 top
R93 "75" RESC1005X40N 58.1,30.87 r270 top
R94 "1k" RESC1608X55N 29.4,63.1 r180 top
R95 "1k" RESC1608X55N 29.4,61.5 r0 top
R96 "12k" RESC2012X60N 30.2,65.7 r270 top
R97 "4k02" RESC1608X55N 28.4,65.4 r270 top
R98 "51" RESC1608X55N 28.7,55.1 r0 top
R99 "10k" RESC1005X35N 30.7,56 r270 top
R100 "10k" RESC1005X35N 12.88,32.7 r270 top
R102 "10k" RESC1005X35N 10,35 r0 top
R103 "10k" RESC1005X35N 8.1,35 r180 top
R105 "10k" RESC1005X35N 5.3,32.7 r270 top
R106 "3k" RESC1005X40N 8.4,25.9 r90 top
R107 "10k" RESC1005X40N 7.4,25.9 r270 top
R108 "1k" RESC1005X40N 9.7,24.3 r0 top
R109 "52k3" RESC1608X55N 7.7,30 r0 top
R110 "10k" RESC1005X35N 10.2,30.3 r180 top
SCREW3 "M2.5x4" BOSSARD_BN5687-3061587_v 69.182,65 r90 top
SCREW4 "M2.5x4" BOSSARD_BN5687-3061587_v 39.182,65 r90 top
SCREW5 "M2.5x4" BOSSARD_BN5687-3061587_v 69.182,85 r90 top
SCREW6 "M2.5x4" BOSSARD_BN5687-3061587_v 39.182,85 r90 top
T2 "IXTP96P085T" "TO-220-H-SMD - CUTOUT" 52.354,65 r270 top locked
T3 "BC847C" SOT95P240X110-3N 42.6,53.2 r270 top
T4 "IXTP96P085T" "TO-220-H-SMD - CUTOUT" 52.354,85 r270 top locked
T5 "BSC600N25NS3GATMA1" INFINEON_PG-TDSON-8 20.675,94.835 r180 top
T6 "BSS138LT1G" SOT95P240X110-3N 8.1,64.9 r180 top
T7 "BSS138LT1G" SOT95P240X110-3N 8.1,61.3 r180 top
T8 "BSC050N03LSGATMA1" INFINEON_PG-TDSON-8 23.9,24 r180 top
T9 "BSC050N03LSGATMA1" INFINEON_PG-TDSON-8 28.9,17.025 r90 top

## Footprints (in the part's own frame and the unit in brackets; to place one, negate y for a bottom-side part, rotate by r counter-clockwise, add the part's x,y. Pads: shape width x height; smd on the part's side, far side on the other; paste and mask are expansions set on the pad)
691317510002 [mm] "5,08mm - PCB Horizontal Closed With flanges - 02p"
  rrect50% 2.4x2.4 hole 1.6: 1(-2.54,4)
  round 2.4 hole 1.6: 2(2.54,4)
  silkscreen extent -10.16,0.7 10.16,6, body extent -10.16,-6 10.16,6, height 8.55
691317710002 [mm] "5.00mm - Closed Horizhontal PCB Header with Flanges - 02p"
  rrect50% 2.4x2.4 hole 1.6: 1(-2.5,4)
  round 2.4 hole 1.6: 2(2.5,4)
  silkscreen extent -10,0.71 10,6, body extent -10,-6 10,6, height 8.55
60611002111502 [mm] "MCX PCB THT Jack"
  round 1.8 hole 1.2: 1(0,0)
  round 2.55 hole 1.7: 2(-2.54,2.54) 3(2.54,2.54) 4(2.54,-2.54) 5(-2.54,-2.54)
  silkscreen extent -3,-3 3,3, body extent -3,-6.5 3,3, height 6
BOSSARD_BN5687-3061587_v [mm] "M2.5 L=4mm Hexalobular Socket Pan Head Screw, Fully Threaded - Stainless Steel A2"
  body extent -2.5,-2.5 2.5,2.5, height 2.1
CAPAE830X620N [mm] "Capacitor, Aluminium Electrolytric, 8.3mm L X 8.3mm W X 6.2mm H, IPC Medium Density"
  rect 4.15x1.6 smd: 1(-3.15,0) 2(3.15,0)
  silkscreen extent -4.9,-4.15 4.15,4.15, body extent -4.75,-4.25 4.75,4.25, height 6.2
CAPAE1030X1020N [mm] "Capacitor, Aluminium Electrolytric, 10.3mm L X 10.3mm W X 10.2mm H, IPC Medium Density"
  rect 4.5x2.1 smd: 1(-4.5,0) 2(4.5,0)
  silkscreen extent -6.02,-5.15 5.15,5.15, body extent -6,-5.25 6,5.25, height 10.2
CAPC1005X55N [mm] "Capacitor, Non-Polarized, Chip; 1.00mm L X 0.50mm W X 0.70mm H, IPC Medium Density"
  rect 0.62x0.62 smd: 1(-0.45,0) 2(0.45,0)
  body extent -0.52,-0.27 0.53,0.28, height 0.55
CAPC1608X80N [mm] "Chip Capacitor, Body 1.6x0.8mm IPC Medium Density"
  rect 1x1 smd: 1(-0.75,0) 2(0.75,0)
  body extent -0.87,-0.47 0.88,0.48, height 0.8
CAPC1608X87N [mm] "Chip Capacitor, Body 1.6x0.8mm IPC Medium Density"
  rect 0.95x1 smd: 1(-0.8,0) 2(0.8,0)
  body extent -0.87,-0.47 0.88,0.48, height 0.87
CAPC1709X100N [mm] "Capacitor,non-Polarized, Chip;1.65mm L X 0.85mm W X 1.00mm H, IPC Medium Density"
  rect 0.95x1.05 smd: 1(-0.8,0) 2(0.8,0)
  body extent -0.9,-0.5 0.9,0.5, height 1
CAPC2012X135N [mm] "Chip Capacitor, Body 2.0x1.25mm, IPC Medium Density"
  rect 1.05x1.4 smd: 1(-0.9,0) 2(0.9,0)
  silkscreen extent 0,-0.58 0,0.58, body extent -1.05,-0.67 1.05,0.68, height 1.25
CAPC3216X180N [mm] "Chip Capacitor, Body 3.2x1.6mm, IPC Medium Density"
  rect 1.15x1.8 smd: 1(-1.5,0) 2(1.5,0)
  silkscreen extent -0.55,-0.8 0.55,0.8, body extent -1.7,-0.9 1.7,0.9, height 1.8
CAPMP3216X180N [mm] "Capacitor, Polarized, Molded  Body 3.2x1.6mm, IPC Medium Density"
  rect 1.8x1.25 smd: 1(-1.3,0) 2(1.3,0)
  silkscreen extent -2.4,-0.7 0,1.25, body extent -1.7,-0.9 1.7,0.9, height 1.6
CAPMP3528X210N [mm] "Capacitor, Polarized, Molded  Body 3.5x2.8mm, IPC Medium Density"
  rect 1.8x2.25 smd: 1(-1.45,0) 2(1.45,0)
  silkscreen extent -2.5,-1.5 1.85,1.72, body extent -1.85,-1.5 1.85,1.5, height 2.1
DIODES-INC_POWERDI123 [mm] "SODFL Diode; 2.8mm W X 1.78mm L X mm H Body, POWERDI®123 Case"
  rect 2.2x1.4 smd: 1(-0.95,0)
  rect 0.9x1.4 smd: 2(1.6,0)
  silkscreen extent -1.85,-0.7 0.8,1.32, body extent -1.85,-0.89 1.85,0.89, height 1
DIOM5326X230N [mm] "DO-214-AC/SMA Molded Diode, Body 5.3x2.6mm, IPC Medium Density"
  rect 2.1x1.55 smd: 1(-2.2,0) 2(2.2,0)
  silkscreen extent -3.53,-1.4 2.75,1.45, body extent -2.75,-1.4 2.75,1.4, height 2.3
DIOM7959X262N [mm] "DO-214-AB/SMC Molded Diode, Body 7.9x5.9mm, IPC Medium Density"
  rect 2.2x3.15 smd: 1(-3.5,0) 2(3.5,0)
  silkscreen extent -4.83,-3.1 4.05,3.1, body extent -4.06,-3.11 4.07,3.11, height 2.62
FIL_MURATA_BNX02 [mm] "Block Type EMIFIL LC Combined Type, BNX02* Series"
  rect 3.8x2.5 smd: 1(-6.85,2.1) 2(6.85,2.1) 3(-6.85,-2.2) 4(6.85,-2.2)
  rect 7.9x2.3 smd: 4(1,-5.1)
  rect 3.4x2.3 smd: 4(3.25,5.1)
  silkscreen extent -5.95,-4.45 7.77,5.05, body extent -6.05,-4.55 6.05,4.55, height 3.1
IND_COILCRAFT_EPL3015 [mm] "SMD Inductor  Body Width 3.2mm Body Lenght 3.2mm Height 1.55mm, EPL3015 Series"
  rect 1x2.9 smd: 1(-1.015,0) 2(1.015,0)
  silkscreen extent -0.16,-1.6 0.16,1.6, body extent -1.6,-1.6 1.6,1.6, height 1.55
IND_COILCRAFT_XAL4030 [mm] "SMD Inductor, Width 4.3mm X Lenght 4.3mm X Height 3.1mm Body, XAL4030 Series"
  rect 0.98x3.4 smd: 1(-1.185,0) 2(1.185,0)
  silkscreen extent -2.15,-2.15 2.15,2.15, body extent -2.15,-2.15 2.15,2.15, height 3.1
IND_WURTH_WE-PD_7332(METAL) [mm] "Power Choke, WE-PD Serie, Body 7.3x7.3mm (Metal Base)"
  rect 1.6x2.2 smd: 1(-3.2,0) 2(3.2,0)
  silkscreen extent -3.65,-3.65 3.65,3.65, body extent -3.65,-3.65 3.65,3.65, height 3.4
IND_WURTH_WE-TPC_4828 [mm] "Shielded Tiny Power Inductor, Body 4.8x4.8mm"
  rect 0.95x5.3 smd: 1(-2.275,0) 2(2.275,0)
  rect 1.05x1.014 smd: 1(-1.275,2.143) 1(-1.275,-2.143) 2(1.275,2.143) 2(1.275,-2.143)
  L1 region: 2.75,-2.65 0.75,-2.65 0.75,-1.636 1.394,-1.138 1.753,-0.407 1.753,0.407 1.394,1.138 0.75,1.636 0.75,1.636 0.75,2.65 2.75,2.65
  L1 region: -2.75,-2.65 -0.75,-2.65 -0.75,-1.636 -1.394,-1.138 -1.753,-0.407 -1.753,0.407 -1.394,1.138 -0.75,1.636 -0.75,1.636 -0.75,2.65 -2.75,2.65
  L1 region: 0.75,-2.65 2.75,-2.65 2.75,2.65 0.75,2.65 0.75,1.636 1.394,1.138 1.753,0.407 1.753,-0.407 1.394,-1.138 0.75,-1.636 0.75,-1.636
  silkscreen extent -0.35,-2.4 0.35,2.4, body extent -2.4,-2.4 2.4,2.4, height 2.8
INDC1608X65N [mm] "Chip Inductor, 2-Leads, EIA 0603, Metric 1608, Body 1.6x0.8mm, IPC Medium Density"
  rect 1x1 smd: 1(-0.75,0) 2(0.75,0)
  body extent -0.87,-0.47 0.88,0.48, height 0.65
INFINEON_PG-TDSON-8 [mm] "TDSON, 8-Leads, Body 6.15x5.15mm, Pitch 1.27mm"
  rect 1.2x0.65 smd: 1(-2.825,1.905) 2(-2.825,0.635) 3(-2.825,-0.635) 4(-2.825,-1.905)
  rect 4.5x4.7 smd: D(0.675,0)
  rect 1.2x0.7 smd: D(2.825,2) D(2.825,-0.665) D(2.825,0.665) D(2.825,-2)
  silkscreen extent -4.05,1.83 -3.8,2.07, body extent -3.07,-2.7 3.08,2.7, height 1.1
"Kemet R71 32x28x14" [mm]
  round 2.5 hole 1: 1(-13.75,0) 2(13.75,0)
  silkscreen extent -16.3,-7.2 16.3,7.2, body extent -16.15,-7.11 16.15,7.1, height 28.11
LED_AVAGO_HSMC-C120 [mm] "Red Chip LED, 2-Leads, Body 1.7x1.1mm, Side Emitting Package"
  rect 0.8x0.7 smd: 1(-1,0) 2(1,0)
  rect 0.4x0.4 smd: 3(0,-0.35)
  silkscreen extent -1.12,-0.92 -0.88,-0.68, body extent -0.85,-0.3 0.85,0.8, height 0.7
MOLEX_47272-0001 [mm] "20 Circuits, 0.50mm Pitch, Right Angle DisplayPort* Male Receptacle"
  rect 0.28x2.4 smd: 1(4.75,0) 2(4.25,0) 3(3.75,0) 4(3.25,0) 5(2.75,0) 6(2.25,0) 7(1.75,0) 8(1.25,0) 9(0.75,0) 10(0.25,0) 11(-0.25,0) 12(-0.75,0) 13(-1.25,0) 14(-1.75,0) 15(-2.25,0) 16(-2.75,0) 17(-3.25,0) 18(-3.75,0) 19(-4.25,0) 20(-4.75,0)
  round 0.5 hole 1.4 unplated mask+0.45: MTG1(-0.75,-10.28)
  oval 1.2x2.8 hole 0.6 slot 2.2 at 90 deg: SHIELD(-9,-2.6) SHIELD(7.5,-2.6)
  oval 1.2x2.3 hole 0.6 slot 1.7 at 90 deg: SHIELD(-9,-9.38) SHIELD(7.5,-9.38)
  silkscreen extent -9.2,-10.83 7.7,1.82, body extent -9.64,-14.58 8.14,0.31, height 6.65
MTG270_500#1 [mm] "Plated Through Hole: Hole Dia.=2.7mm Pad Dia.=5.0mm"
  round 5 / inner round 4 / far side round 5 hole 2.7: 1(0,0)
MTG270_500#2 [mm] "Plated Through Hole: Hole Dia.=2.7mm Pad Dia.=5.0mm"
  round 5 hole 2.7: 1(0,0)
RES_OHMITE_LVK25 [mm] "Resistor Four Terminal High Precision Current Sense, Chip; 3.2mm L X 6.4mm W X 0.7mm H"
  rect 3.3x1.4 smd: I1(2.15,1.8) I2(2.15,-1.8) V1(-2.15,1.8) V2(-2.15,-1.8)
  silkscreen extent -3.3,-1.7 3.3,1.7, body extent -3.2,-1.6 3.2,1.6, height 0.7
RES_OHMITE_OY_mb [mm] "Resistor, Axial, Pad spacing 30mm - Body Lengh 22.5mm X Body Diameter 8mm"
  round 1.8 hole 1.1: 1(-14,0) 2(14,0)
  silkscreen extent -12.8,-4 12.8,4, body extent -11.25,-4 11.25,4, height 8
RESC1005X35N [mm] "Chip Resistor, EIA 0402, Metric 1005, Body 1.0x0.5mm, IPC Medium Density"
  rect 0.58x0.62 smd: 1(-0.47,0) 2(0.47,0)
  body extent -0.52,-0.27 0.53,0.28, height 0.35
RESC1005X40N [mm] "Chip Resistor, EIA 0402, Metric 1005, Body 1.0x0.5mm, IPC Medium Density"
  rect 0.58x0.62 smd: 1(-0.47,0) 2(0.47,0)
  body extent -0.52,-0.27 0.53,0.28, height 0.4
RESC1608X55N [mm] "Chip Resistor, EIA 0603, Metric 1608, Body 1.6x0.8mm, IPC Medium Density"
  rect 0.9x1 smd: 1(-0.8,0) 2(0.8,0)
  body extent -0.87,-0.47 0.88,0.48, height 0.55
RESC2012X60N [mm] "Chip Resistor, EIA 0805, Metric 2012, Body 2.0x1.2mm, IPC Medium Density"
  rect 0.95x1.4 smd: 1(-1,0) 2(1,0)
  silkscreen extent 0,-0.55 0,0.55, body extent -1.1,-0.67 1.1,0.68, height 0.6
RESC3216X65N [mm] "Chip Resistor, EIA 1206, Metric 3216, Body 3.2x1.6mm, IPC Medium Density"
  rect 1.15x1.8 smd: 1(-1.45,0) 2(1.45,0)
  silkscreen extent -0.5,-0.9 0.5,0.9, body extent -1.67,-0.87 1.68,0.88, height 0.65
RPA0010A [mm]
  rect 0.6x0.25 smd: 1(-1.4,0.75) 2(-1.4,0.25) 3(-1.4,-0.25) 4(-1.4,-0.75) 8(1.42,-0.25) 8(1.42,0.25) 8(1.42,0.75)
  rect 0.25x0.6 smd: 5(-0.93,-1.4) 7(0.87,-1.4) 10(-0.93,1.4)
  rect 0.25x1.7 smd: 6(0.37,-0.85)
  rect 0.4x2.1 smd: 8(0.95,0.65) 9(-0.21,0.65)
  body extent -1.5,-1.5 1.5,1.5, height 1
SOD2513X100N [mm] "SOD-323 Diode; 1.70mm W X 1.25mm L X 1.00mm H Body, IPC Medium Density"
  rect 0.85x0.5 smd: 1(-1.25,0) 2(1.25,0)
  silkscreen extent -1.52,-0.65 0.85,0.88, body extent -1.25,-0.62 1.25,0.63, height 1
SODFL1608X65N [mm] "Ultra Small Outline Diode Flat Lead (SOD-523), Body; 1.2mm L X 0.8mm W X 0.65mm H, IPC Medium Density"
  rect 0.75x0.5 smd: 1(-0.7,0) 2(0.7,0)
  silkscreen extent -1.19,0.63 -1.01,0.67, body extent -0.82,-0.42 0.83,0.43, height 0.65
SOIC127P600X175-8N [mm] "SOIC 8, Pitch 1.27mm - Body 4x5mm, IPC Medium Density"
  rect 1.55x0.6 smd: 1(-2.7,1.905) 2(-2.7,0.635) 3(-2.7,-0.635) 4(-2.7,-1.905) 5(2.7,-1.905) 6(2.7,-0.635) 7(2.7,0.635) 8(2.7,1.905)
  silkscreen extent -2.52,-2.5 1.55,2.88, body extent -3.1,-2.5 3.1,2.5, height 1.75
SON50P300X400X80-13N-R180X340 [mm] "SON, (DFN) 0.50mm,pitch;12 pin,3.00mm W X 4.00mm L X 0.80mm H body (w/thermal tab 1.8 X3.4mm), IPC Medium Density"
  rect 0.8x0.3 smd: 1(-1.5,1.25) 2(-1.5,0.75) 3(-1.5,0.25) 4(-1.5,-0.25) 5(-1.5,-0.75) 6(-1.5,-1.25) 7(1.5,-1.25) 8(1.5,-0.75) 9(1.5,-0.25) 10(1.5,0.25) 11(1.5,0.75) 12(1.5,1.25)
  rect 1.8x3.4 smd: 13(0,0)
  silkscreen extent -1.5,-2 1.5,2, body extent -1.55,-2.05 1.55,2.05, height 0.8
SOP50P490X110-11N-R168X198 [mm] "SOP, 0.50mm, Pitch; 10 pin, 3.00mm W X 3.00mm L X 1.10mm H body (w/thermal tab  1.68 X 1.98 mm), IPC Medium Density"
  rect 1.45x0.3 smd: 1(-2.2,1) 2(-2.2,0.5) 3(-2.2,0) 4(-2.2,-0.5) 5(-2.2,-1) 6(2.2,-1) 7(2.2,-0.5) 8(2.2,0) 9(2.2,0.5) 10(2.2,1)
  rect 1.68x1.98 smd: 11(0,0)
  silkscreen extent -2.77,-1.5 1.1,1.77, body extent -2.45,-1.55 2.45,1.55, height 1.1
SOP65P490X110-8N [mm] "SOP, 0.65mm pitch; 8 pin, 3.00mm W X 3.00mm L X 1.10mm H body, IPC Medium Density"
  rect 1.5x0.45 smd: 1(-2.2,0.975) 2(-2.2,0.325) 3(-2.2,-0.325) 4(-2.2,-0.975) 5(2.2,-0.975) 6(2.2,-0.325) 7(2.2,0.325) 8(2.2,0.975)
  silkscreen extent -2.82,-1.5 1.1,1.83, body extent -2.45,-1.55 2.45,1.55, height 1.1
SOP65P490X110-9N-R157X189 [mm] "SOP,0.65mm,pitch; 8 pin,3.00mm W X 3.00mm L X 1.10mm H body (w/thermal tab 1.57 X 1.89 mm), IPC Medium Density"
  rect 1.45x0.45 smd: 1(-2.2,0.975) 2(-2.2,0.325) 3(-2.2,-0.325) 4(-2.2,-0.975) 5(2.2,-0.975) 6(2.2,-0.325) 7(2.2,0.325) 8(2.2,0.975)
  rect 1.57x1.89 smd: 9(0,0)
  silkscreen extent -2.77,-1.5 1.1,1.82, body extent -2.45,-1.47 2.45,1.48, height 1.1
SOP65P640X120-21N-R305X425 [mm] "SOP, 0.65mm Pitch; 20 Pin, 4.40mm W X 6.50mm L X 1.20mm H Body (w/Thermal Tab 3.05mm X 4.25mm), IPC Medium Density"
  rect 1.5x0.45 smd: 1(-2.9,2.925) 2(-2.9,2.275) 3(-2.9,1.625) 4(-2.9,0.975) 5(-2.9,0.325) 6(-2.9,-0.325) 7(-2.9,-0.975) 8(-2.9,-1.625) 9(-2.9,-2.275) 10(-2.9,-2.925) 11(2.9,-2.925) 12(2.9,-2.275) 13(2.9,-1.625) 14(2.9,-0.975) 15(2.9,-0.325) 16(2.9,0.325) 17(2.9,0.975) 18(2.9,1.625) 19(2.9,2.275) 20(2.9,2.925)
  rect 3.05x4.25 smd: 21(0,0)
  silkscreen extent -3.52,-3.25 1.8,3.77, body extent -3.12,-3.3 3.12,3.3, height 1.2
SOT65P210X110-5N [mm] "SOT353, SC70-5, SOT, 0.65mm Pitch, 5 Pin, 1.25mm W X 2.00mm L X 1.10mm H, IPC Medium Density"
  rect 0.95x0.4 smd: 1(-1.1,0.65) 2(-1.1,0) 3(-1.1,-0.65) 4(1.1,-0.65) 5(1.1,0.65)
  silkscreen extent -1.43,-1 0.3,1.47, body extent -1.2,-1.1 1.2,1.1, height 1.1
SOT65P212X110-5N [mm] "SOT353, SOT, 0.65mm Pitch, 5 pin, 1.25mm W X 2.05mm L X 1.10mm H, IPC Medium Density"
  rect 0.9x0.4 smd: 1(-1.05,0.65) 2(-1.05,0) 3(-1.05,-0.65) 4(1.05,-0.65) 5(1.05,0.65)
  silkscreen extent -1.37,-1.05 0.28,1.46, body extent -1.2,-1.1 1.2,1.1, height 1.1
SOT95P240X110-3N [mm] "SOT23 3-Leads, Pitch 0.95mm, Body 1.3x2.9mm, IPC Medium Density"
  rect 1.05x0.65 smd: 1(-1.15,0.95) 2(-1.15,-0.95) 3(1.15,0)
  silkscreen extent -1.52,-1.45 0.3,1.92, body extent -1.25,-1.5 1.25,1.5, height 1.1
SOT95P251X112-3N [mm] "SOT23 3-Leads, Pitch 0.95mm - Body 1.3x2.9mm, IPC Medium Density"
  rect 1.05x0.65 smd: 1(-1.2,0.95) 2(-1.2,-0.95) 3(1.2,0)
  silkscreen extent -0.35,-1.45 0.35,1.45, body extent -1.27,-1.5 1.27,1.5, height 1.12
SOT95P280X100-5N [mm] "SOT23, 0.95mm pitch; 5 pin, 1.625mm W X 2.9mm L, IPC Medium Density"
  rect 1.1x0.55 smd: 1(-1.35,0.95) 2(-1.35,0) 3(-1.35,-0.95) 4(1.35,-0.95) 5(1.35,0.95)
  silkscreen extent -1.77,-1.45 0.48,1.87, body extent -1.4,-1.5 1.4,1.5, height 1
SOT95P280X100-6N [mm] "SOT23, 0.95mm pitch; 6 pin, 1.625mm W X 2.90mm L X 1.00mm H body, IPC Medium Density"
  rect 1.1x0.55 smd: 1(-1.35,0.95) 2(-1.35,0) 3(-1.35,-0.95) 4(1.35,-0.95) 5(1.35,0) 6(1.35,0.95)
  silkscreen extent -1.75,-1.45 0.45,1.87, body extent -1.4,-1.5 1.4,1.5, height 1
SOT95P280X145-5N [mm] "SOT, 0.95mm pitch; 5 pin, 1.60mm W X 2.90mm L X 1.45mm H body, IPC Medium Density"
  rect 1.1x0.6 smd: 1(-1.3,0.95) 2(-1.3,0) 3(-1.3,-0.95) 4(1.3,-0.95) 5(1.3,0.95)
  silkscreen extent -1.73,-1.45 0.43,1.87, body extent -1.4,-1.5 1.4,1.5, height 1.45
SPM10065VT-1R5M-D [mm]
  rect 2.95x4.5 smd: 1(-4.525,0) 2(4.525,0)
  body extent -5.25,-5 5.25,5, height 6.36
"TO-220-H-SMD - CUTOUT" [mm] "TO-220 3-Terminal + Tab - Horizontal Mount"
  rrect50% 2x5 smd: 1(-2.54,0.683) 2(0,0.683) 3(2.54,0.683)
  Keep-Out Layer board cut-out: -5.6,4.75 -5.6,19.25 -5.543,19.537 -5.38,19.78 -5.137,19.943 -4.85,20 -4.85,20 4.85,20 5.137,19.943 5.38,19.78 5.543,19.537 5.6,19.25 5.6,19.25 5.6,4.75 5.543,4.463 5.38,4.22 5.137,4.057 4.85,4 4.85,4 -4.85,4 -5.137,4.057 -5.38,4.22 -5.543,4.463 -5.6,4.75
  body extent -5.08,-0.67 5.08,19.5, height 2.92
TSSOP50P490X86_HS-17N [mm] "TSSOP, 16-Leads, Body 4.04x3.00mm, Pitch 0.50mm, Thermal Pad 2.85x1.65mm, IPC Medium Density"
  oval 0.95x0.3 smd: 1(-2.2,1.75) 2(-2.2,1.25) 3(-2.2,0.75) 4(-2.2,0.25) 5(-2.2,-0.25) 6(-2.2,-0.75) 7(-2.2,-1.25) 8(-2.2,-1.75) 9(2.2,-1.75) 10(2.2,-1.25) 11(2.2,-0.75) 12(2.2,-0.25) 13(2.2,0.25) 14(2.2,0.75) 15(2.2,1.25) 16(2.2,1.75)
  rect 1.65x2.85 smd: 17(0,0)
  silkscreen extent -2.32,-2.02 1.1,2.57, body extent -2.45,-2 2.45,2, height 0.86

## Part data
B1 B2 B6 B8: library part PLATED_HOLE2.7_PAD5.0, "Single Terminal Socket", Author="CERN DEM JMW", ComponentHeight=0mm, Component Type="Standard (No BOM)", CreateDate=27.09.2011, Family="Plated Hole", HelpURL=Undefined, LatestRevisionDate=27.09.2011, Mounted=No, PackageDescription="Plated Through Hole: Hole Dia.=2.7mm Pad Dia.=5.0mm", Part Description="Plated Through Hole: Hole Dia.=2.7mm Pad Dia.=5.0mm", Part Number=PLATED_HOLE2.7_PAD5.0, Pin Count=1, Sense=No, SMD=No, Socket=No, Status=None
C1 C4 C106 C109: library part CC0402_1NF_50V_10%_X7R, "Non-polarised capacitor", Case=0402, Manufacturer=GENERIC, Manufacturer1 ComponentHeight=0.55mm, Manufacturer1 Example=PHYCOMP, Manufacturer1 Part Number=223858715623, Tolerance=±10%, Voltage=50V, Author="CERN DEM JLC", Component Type=Standard, CreateDate=12/3/2007, HelpURL=\\cern.ch\dfs\Applications\Altium\Datasheets\CC0402_X7R_PHYCOMP.pdf, LatestRevisionDate=12/3/2007, Manufacturer Part Number=CC0402_1NF_50V_10%_X7R, Mounted=Yes, Part Description="SMD Multilayer Chip Ceramic Capacitor", Part Number=CC0402_1NF_50V_10%_X7R, Pin Count=2, Sense=No, SMD=Yes, Socket=No, Status="Not Recommended", TC=X7R
C2 C3 C5 C6 C8 C9 C14 C24 C31 C40 C56 C57 C62 C69 C94 C95 C96 C97 C98 C99 C100 C101 C102 C103 C104 C105 C107 C108: library part CC0402_100NF_16V_10%_X5R, "Non-polarised capacitor", Case=0402, Manufacturer=GENERIC, Manufacturer1 ComponentHeight=0.55mm, Manufacturer1 Example=MURATA, Manufacturer1 Part Number=GRM155R61C104KA88D, Tolerance=±10%, Voltage=16V, Author="CERN DEM JLC", Component Type=Standard, CreateDate=10.12.2013, HelpURL=\\cern.ch\dfs\Applications\Altium\Datasheets\CC0402_X5R_MURATA_GRM.pdf, LatestRevisionDate=10.12.2013, Manufacturer Part Number=CC0402_100NF_16V_10%_X5R, Mounted=Yes, Part Description="SMD Multilayer Chip Ceramic Capacitor", Part Number=CC0402_100NF_16V_10%_X5R, Pin Count=2, Sense=No, SMD=Yes, Socket=No, Status=None, TC=X5R
C7: library part R71XR510050H0K, "Film Capacitor, Polypropylene, 450V, 10% +Tol, 10% -Tol, 10uF, Through Hole Mount", Case/Package=Radial, Dielectric Material=Polypropylene, ESR (Equivalent Series Resistance)=10mΩ, Manufacturer=KEMET, Max Operating Temperature=125°C, Min Operating Temperature=-55°C, Ripple Current=8.68A, Supplier Part Number=399-R71XR510050H0K-ND, Voltage Rating (AC)=160V, Voltage Rating (DC)=450V, Category="Film Capacitors", ComponentLink1Description=https://datasheet.octopart.com:443/R71XR510050H0K-KEMET-datasheet-182036269.pdf?src-supplier=Newark, ComponentLink1URL=https://datasheet.octopart.com:443/R71XR510050H0K-KEMET-datasheet-182036269.pdf?src-supplier=Newark, ComponentLink2Description=https://datasheet.octopart.com:443/R71XR510050H0K-KEMET-datasheet-155475596.pdf?src-supplier=Newark, ComponentLink2URL=https://datasheet.octopart.com:443/R71XR510050H0K-KEMET-datasheet-155475596.pdf?src-supplier=Newark, ComponentLink3Description=https://datasheet.octopart.com:443/R71XR510050H0K-KEMET-datasheet-181969059.pdf?src-supplier=Farnell, ComponentLink3URL=https://datasheet.octopart.com:443/R71XR510050H0K-KEMET-datasheet-181969059.pdf?src-supplier=Farnell, Contact Plating=Tin, Height=28mm, Length=32mm, Lifecycle Status=Production, Manufacturer Part Number=R71XR510050H0K, Number of Terminals=2, Pricing="1=4.71, 10=3.387, 50=2.8622, 176=2.58898, 528=2.41778, 1056=2.33397, 2640=2.24539 (USD)", REACH SVHC=Yes, RoHS=Compliant, Stock=290, Supplier=DigiKey, Terminal Pitch=27.5mm, Width=14mm
C10: library part CC0603_10UF_10V_10%_X5R, "Non-polarised capacitor", Case=0603, Manufacturer=GENERIC, Manufacturer1 ComponentHeight=0.8mm, Manufacturer1 Example=MURATA, Manufacturer1 Part Number=GRM188R61A106KE69D, Tolerance=±10%, Voltage=10V, Author="CERN DEM JLC", Component Type=Standard, CreateDate=31.01.2017, HelpURL=\\cern.ch\dfs\Applications\Altium\Datasheets\CC0603_MURATA_GRM188R61A106KE69D.pdf, LatestRevisionDate=31.01.2017, Manufacturer Part Number=CC0603_10UF_10V_10%_X5R, Mounted=Yes, Part Description="SMD Multilayer Chip Ceramic Capacitor", Part Number=CC0603_10UF_10V_10%_X5R, Pin Count=2, Sense=No, SMD=Yes, Socket=No, Status=None, TC=X5R
C11 C32 C42: library part CC0402_100NF_50V_10%_X7R, "Non-polarised capacitor", Case=0402, Manufacturer=GENERIC, Manufacturer1 ComponentHeight=0.55mm, Manufacturer1 Example=MURATA, Manufacturer1 Part Number=GRM155R71H104KE14D, Tolerance=±10%, Voltage=50V, Author="CERN DEM MR", Component Type=Standard, CreateDate=6/30/2017, HelpURL=\\cern.ch\dfs\Applications\Altium\Datasheets\CC0402_MURATA_GRM155R71H104KE14D.pdf, LatestRevisionDate=6/30/2017, Manufacturer Part Number=CC0402_100NF_50V_10%_X7R, Mounted=Yes, Part Description="SMD Multilayer Chip Ceramic Capacitor", Part Number=CC0402_100NF_50V_10%_X7R, Pin Count=2, Sense=No, SMD=Yes, Socket=No, Status=None, TC=X7R
C12: library part CAE830-620_220UF_16V_20%, "Polarised capacitor", Case=E, Manufacturer=PANASONIC, Manufacturer1 Part Number=EEEFK1C221AP, Tolerance=±20%, Voltage=16V, Author="CERN DEM JLC", Component Type=Standard, ComponentHeight=6.2mm, CreateDate=03.12.2007, HelpURL=\\cern.ch\dfs\Applications\Altium\Datasheets\CAE_PANASONIC_FK.pdf, LatestRevisionDate=05.11.2014, Manufacturer Part Number=EEEFK1C221AP, Mounted=Yes, Part Description="Aluminum Electrolytic SMT Capacitor", Part Number=CAE830-620_220UF_16V_20%, Pin Count=2, Sense=No, SMD=Yes, Socket=No, Status="Not Recommended"
C13: library part CC0402_1UF_16V_10%_X5R, "Non-polarised capacitor", Case=0402, Manufacturer=GENERIC, Manufacturer1 ComponentHeight=0.55mm, Manufacturer1 Example=TDK, Manufacturer1 Part Number=C1005X5R1C105KT, Tolerance=±10%, Voltage=16V, Author="CERN DEM JLC", Component Type=Standard, CreateDate=25.10.2012, HelpURL=\\cern.ch\dfs\Applications\Altium\Datasheets\CC0402_X5R_TDK_C.pdf, LatestRevisionDate=25.10.2012, Manufacturer Part Number=CC0402_1UF_16V_10%_X5R, Mounted=Yes, Part Description="SMD Multilayer Chip Ceramic Capacitor", Part Number=CC0402_1UF_16V_10%_X5R, Pin Count=2, Sense=No, SMD=Yes, Socket=No, Status=Preferred, TC=X5R
C15 C68 C76: library part CC0603_1UF_25V_10%_X7R, "Non-polarised capacitor", Case=0603, Manufacturer=GENERIC, Manufacturer1 ComponentHeight=0.9mm, Manufacturer1 Example=MURATA, Manufacturer1 Part Number=GCM188R71E105KA64D, Tolerance=±10%, Voltage=25V, Author="CERN DEM JLC", Component Type=Standard, CreateDate=18.01.2011, HelpURL=\\cern.ch\dfs\Applications\Altium\Datasheets\CC0603_X7R_MURATA.pdf, LatestRevisionDate=18.01.2011, Manufacturer Part Number=CC0603_1UF_25V_10%_X7R, Mounted=Yes, Part Description="SMD Multilayer Chip Ceramic Capacitor", Part Number=CC0603_1UF_25V_10%_X7R, Pin Count=2, Sense=No, SMD=Yes, Socket=No, Status=None, TC=X7R
C16 C27: library part CTE3216-18_10UF_16V_20%_AVX_TCJ, "Polarised capacitor", Case=A, Manufacturer=AVX, Manufacturer1 Part Number=TCJA106M016R0200, Manufacturer Part Number="TCJA106M016R0200 or  or TR3A106K016C1700", Tolerance=±20%, Voltage=16V, Author="CERN DEM JLC", Component Type=Standard, ComponentHeight=1.8mm, CreateDate=29.03.2012, HelpURL=\\cern.ch\dfs\Applications\Altium\Datasheets\CTE_AVX_TCJ.pdf, LatestRevisionDate=29.03.2012, Mounted=Yes, Part Description="ESR 0R200 Tantalum Solid Electrolytic Chip Capacitor with Conductive Polymer Electrode", Part Number=CTE3216-18_10UF_16V_20%_AVX_TCJ, Pin Count=2, Sense=No, SMD=Yes, Socket=No, Status=Preferred
C17 C25 C26 C28 C29 C30 C63 C64 C65 C66: library part CC0805_22UF_16V_10%_X5R, "Non-polarised capacitor", Case=0805, Manufacturer=GENERIC, Manufacturer1 ComponentHeight=1.35mm, Manufacturer1 Example=TDK, Manufacturer1 Part Number=C2012X5R1C226KT, Tolerance=±10%, Voltage=16V, Author="CERN DEM JLC", Component Type=Standard, CreateDate=25.10.2012, HelpURL=\\cern.ch\dfs\Applications\Altium\Datasheets\CC0805_X5R_TDK_C.pdf, LatestRevisionDate=25.10.2012, Manufacturer Part Number=CC0805_22UF_16V_10%_X5R, Mounted=Yes, Part Description="SMD Multilayer Chip Ceramic Capacitor", Part Number=CC0805_22UF_16V_10%_X5R, Pin Count=2, Sense=No, SMD=Yes, Socket=No, Status=Preferred, TC=X5R
C18 C19 C20 C21 C22 C23 C58 C59 C60 C61: library part CC1206_22UF_35V_20%_X5R, "Non-polarised capacitor", Case=1206, Manufacturer=GENERIC, Manufacturer1 ComponentHeight=1.8mm, Manufacturer1 Example=TDK, Manufacturer1 Part Number=C3216X5R1V226M160, Tolerance=±20%, Voltage=35V, Author="CERN DEM BC", Component Type=Standard, CreateDate=4/5/2024, HelpURL=\\cern.ch\dfs\Applications\Altium\Datasheets\CC1206_X5R_TDK_C.pdf, LatestRevisionDate=4/5/2024, Manufacturer Part Number=CC1206_22UF_35V_20%_X5R, Mounted=Yes, Part Description="SMD Multilayer Chip Ceramic Capacitor", Part Number=CC1206_22UF_35V_20%_X5R, Pin Count=2, Sense=No, SMD=Yes, Socket=No, Status=None, TC=X5R
C33 C49: library part CC0402_1NF_50V_5%_C0G, "Non-polarised capacitor", Case=0402, Manufacturer=GENERIC, Manufacturer1 ComponentHeight=0.55mm, Manufacturer1 Example=KEMET, Manufacturer1 Part Number=C0402C102J5GACTU, Tolerance=±5%, Voltage=50V, Author="CERN DEM BC", Component Type=Standard, CreateDate=9/2/2019, HelpURL="\\cern.ch\dfs\Applications\Altium\Datasheets\CC0402_C0G_KEMET_(Commercial Grade).pdf", LatestRevisionDate=9/2/2019, Manufacturer Part Number=CC0402_1NF_50V_5%_C0G, Mounted=Yes, Part Description="SMD Multilayer Chip Ceramic Capacitor", Part Number=CC0402_1NF_50V_5%_C0G, Pin Count=2, Sense=No, SMD=Yes, Socket=No, Status=Preferred, TC=C0G/NP0
C34 C35: library part CAE1030-1020_470UF_25V_20%, "Polarised capacitor", Case=G, Manufacturer=PANASONIC, Manufacturer Part Number=EEEFK1E471AP, Tolerance=±20%, Voltage=25V, Author="CERN DEM JLC", Component Type=Standard, ComponentHeight=10.2mm, CreateDate=12/3/2007, HelpURL=\\cern.ch\dfs\Applications\Altium\Datasheets\CAE_PANASONIC_FK-V.pdf, LatestRevisionDate=11/5/2014, Mounted=Yes, Part Description="Aluminum Electrolytic SMT Capacitor", Part Number=CAE1030-1020_470UF_25V_20%, Pin Count=2, Sense=No, SMD=Yes, Socket=No, Status="Not Recommended"
C36 C37 C38 C39 C44 C45 C46 C47 C52 C53 C54 C55: library part CC1206_22UF_25V_20%_X5R, "Non-polarised capacitor", Case=1206, Manufacturer=GENERIC, Manufacturer1 ComponentHeight=1.8mm, Manufacturer1 Example=TDK, Manufacturer1 Part Number=C3216X5R1E226M160, Tolerance=±20%, Voltage=25V, Author="CERN DEM WB", Component Type=Standard, CreateDate=7/25/2018, HelpURL=\\cern.ch\dfs\Applications\Altium\Datasheets\CC1206_X5R_TDK_C.pdf, LatestRevisionDate=7/25/2018, Manufacturer Part Number=CC1206_22UF_25V_20%_X5R, Mounted=Yes, Part Description="SMD Multilayer Chip Ceramic Capacitor", Part Number=CC1206_22UF_25V_20%_X5R, Pin Count=2, Sense=No, SMD=Yes, Socket=No, Status=None, TC=X5R
C41: library part CTE3528-21_22UF_10V_10%_LESR0700, "Polarised capacitor", Case=B, Manufacturer=GENERIC, Manufacturer1 ComponentHeight=2.1mm, Manufacturer1 Example=AVX, Manufacturer1 Part Number=TPSB226K010R0700, Tolerance=±10%, Voltage=10V, Author="CERN DEM JLC", Component Type=Standard, CreateDate=05.05.2008, HelpURL=\\cern.ch\dfs\Applications\Altium\Datasheets\CTE-LESR_AVX_TPS.pdf, LatestRevisionDate=20.01.2009, Manufacturer Part Number=CTE3528-21_22UF_10V_10%_LESR0700, Mounted=Yes, Part Description="Low ESR 0R7 Solid Tantalum Chip Capacitor", Part Number=CTE3528-21_22UF_10V_10%_LESR0700, Pin Count=2, Sense=No, SMD=Yes, Socket=No, Status=Preferred
C43: library part CC0402_4.7UF_10V_10%_X5R, "Non-polarised capacitor", Case=0402, Manufacturer=GENERIC, Manufacturer1 ComponentHeight=0.65mm, Manufacturer1 Example=TDK, Manufacturer1 Part Number=C1005X5R1A475K050, Tolerance=±10%, Voltage=10V, Author="CERN DEM BC", Component Type=Standard, CreateDate=1/10/2020, HelpURL=\\cern.ch\dfs\Applications\Altium\Datasheets\CC0402_X5R_TDK_C.pdf, LatestRevisionDate=1/10/2020, Manufacturer Part Number=CC0402_4.7UF_10V_10%_X5R, Mounted=Yes, Part Description="SMD Multilayer Chip Ceramic Capacitor", Part Number=CC0402_4.7UF_10V_10%_X5R, Pin Count=2, Sense=No, SMD=Yes, Socket=No, Status=Preferred, TC=X5R
C48: library part CC0402_100NF_16V_10%_X7R, "Non-polarised capacitor", Case=0402, Manufacturer=GENERIC, Manufacturer1 ComponentHeight=0.55mm, Manufacturer1 Example=MURATA, Manufacturer1 Part Number=GRM155R71C104KA88D, Tolerance=±10%, Voltage=16V, Author="CERN DEM JLC", Component Type=Standard, CreateDate=05.12.2013, HelpURL=\\cern.ch\dfs\Applications\Altium\Datasheets\CC0402_X7R_MURATA_GRM.pdf, LatestRevisionDate=03.12.2007, Manufacturer Part Number=CC0402_100NF_16V_10%_X7R, Mounted=Yes, Part Description="SMD Multilayer Chip Ceramic Capacitor", Part Number=CC0402_100NF_16V_10%_X7R, Pin Count=2, Sense=No, SMD=Yes, Socket=No, Status="Not Recommended", TC=X7R
C50: library part CC0402_4.7NF_16V_10%_X7R, "Non-polarised capacitor", Case=0402, Manufacturer=GENERIC, Manufacturer1 ComponentHeight=0.55mm, Manufacturer1 Example=PHYCOMP, Manufacturer1 Part Number=223878715632, Tolerance=±10%, Voltage=16V, Author="CERN DEM JLC", Component Type=Standard, CreateDate=12/3/2007, HelpURL=\\cern.ch\dfs\Applications\Altium\Datasheets\CC0402_X7R_PHYCOMP.pdf, LatestRevisionDate=12/3/2007, Manufacturer Part Number=CC0402_4.7NF_16V_10%_X7R, Mounted=Yes, Part Description="SMD Multilayer Chip Ceramic Capacitor", Part Number=CC0402_4.7NF_16V_10%_X7R, Pin Count=2, Sense=No, SMD=Yes, Socket=No, Status="Not Recommended", TC=X7R
C51: library part CC0402_39PF_100V_5%_C0G_MURATA_GRM1555C2A390JA01, "Non-polarised capacitor", Case=0402, Manufacturer=MURATA, Manufacturer Part Number=GRM1555C2A390JA01, Tolerance=±5%, Voltage=100V, Author="CERN DEM BC", Component Type=Standard, ComponentHeight=0.55mm, CreateDate=9/1/2020, HelpURL=\\cern.ch\dfs\Applications\Altium\Datasheets\CC0402_MURATA_GRM1555C2A390JA01.pdf, LatestRevisionDate=9/1/2020, Mounted=Yes, Part Description="Chip Multilayer Ceramic Capacitor for General Purpose", Part Number=CC0402_39PF_100V_5%_C0G_MURATA_GRM1555C2A390JA01, Pin Count=2, Sense=No, SMD=Yes, Socket=No, Status=None, TC=C0G/NP0
C67: library part CC0402_100PF_50V_5%_C0G, "SMD Mulitlayer Ceramic Chip Capacitor", Arena Part Number=120-000095, Case=0402, Manufacturer=GENERIC, Manufacturer 1=Murata, Manufacturer 1 Part Number=GCM1555C1H101JA16D, Manufacturer 2=Samsung, Manufacturer 2 Part Number=CL05C101JB5NNNC, Manufacturer 3=YAGEO, Manufacturer 3 Part Number=CC0402JRNPO9BN101, Tolerance=±5%, Voltage=50V, Author="Michal Beldyga", Component Type=Standard, ComponentHeight=0.55mm, CreateDate=1/21/2025, LatestRevisionDate=4/15/2025, Manufacturer Part Number=CC0402_100PF_50V_5%_C0G, Part Number=CC0402_100PF_50V_5%_C0G, Pin Count=2, SMD=Yes, Status=None, TC=C0G
C70 C89: library part CTE3216-18_10UF_16V_20%_AVX_TCJ, "Polarised capacitor", Case=A, Manufacturer=AVX, Manufacturer Part Number=TCJA106M016R0200, Tolerance=±20%, Voltage=16V, Author="CERN DEM JLC", Component Type=Standard, ComponentHeight=1.8mm, CreateDate=29.03.2012, HelpURL=\\cern.ch\dfs\Applications\Altium\Datasheets\CTE_AVX_TCJ.pdf, LatestRevisionDate=29.03.2012, Mounted=Yes, Part Description="ESR 0R200 Tantalum Solid Electrolytic Chip Capacitor with Conductive Polymer Electrode", Part Number=CTE3216-18_10UF_16V_20%_AVX_TCJ, Pin Count=2, Sense=No, SMD=Yes, Socket=No, Status=Preferred
C71 C83 C84 C90: library part CC0603_1UF_25V_10%_X7R, "Non-polarised capacitor", Case=0603, Manufacturer=GENERIC, Manufacturer1 ComponentHeight=0.9mm, Manufacturer1 Example=MURATA, Manufacturer1 Part Number=GRM188R71E105KA12D, Tolerance=±10%, Voltage=25V, Author="CERN DEM JLC", Component Type=Standard, CreateDate=1/18/2011, HelpURL=\\cern.ch\dfs\Applications\Altium\Datasheets\CC0603_X7R_MURATA.pdf, LatestRevisionDate=1/18/2011, Manufacturer Part Number=CC0603_1UF_25V_10%_X7R, Mounted=Yes, Part Description="SMD Multilayer Chip Ceramic Capacitor", Part Number=CC0603_1UF_25V_10%_X7R, Pin Count=2, Sense=No, SMD=Yes, Socket=No, Status=None, TC=X7R